# Altium PCB ETL_RB_v1.3.PcbDoc (part 1 of 5)
Units mm, origin at the board's own origin, x right, y up, seen from the top; angles counter-clockwise.
Board outline 130.3 x 56.5 mm, 8 copper layers (Top Layer, plane 1, M1, plane 2, plane 3, M2, plane 4, Bottom Layer), stack 0.972 mm thick; 212 components, 186 nets, 1928 pads, 1009 vias.
Unrouted connection lines stored in the file: 379.
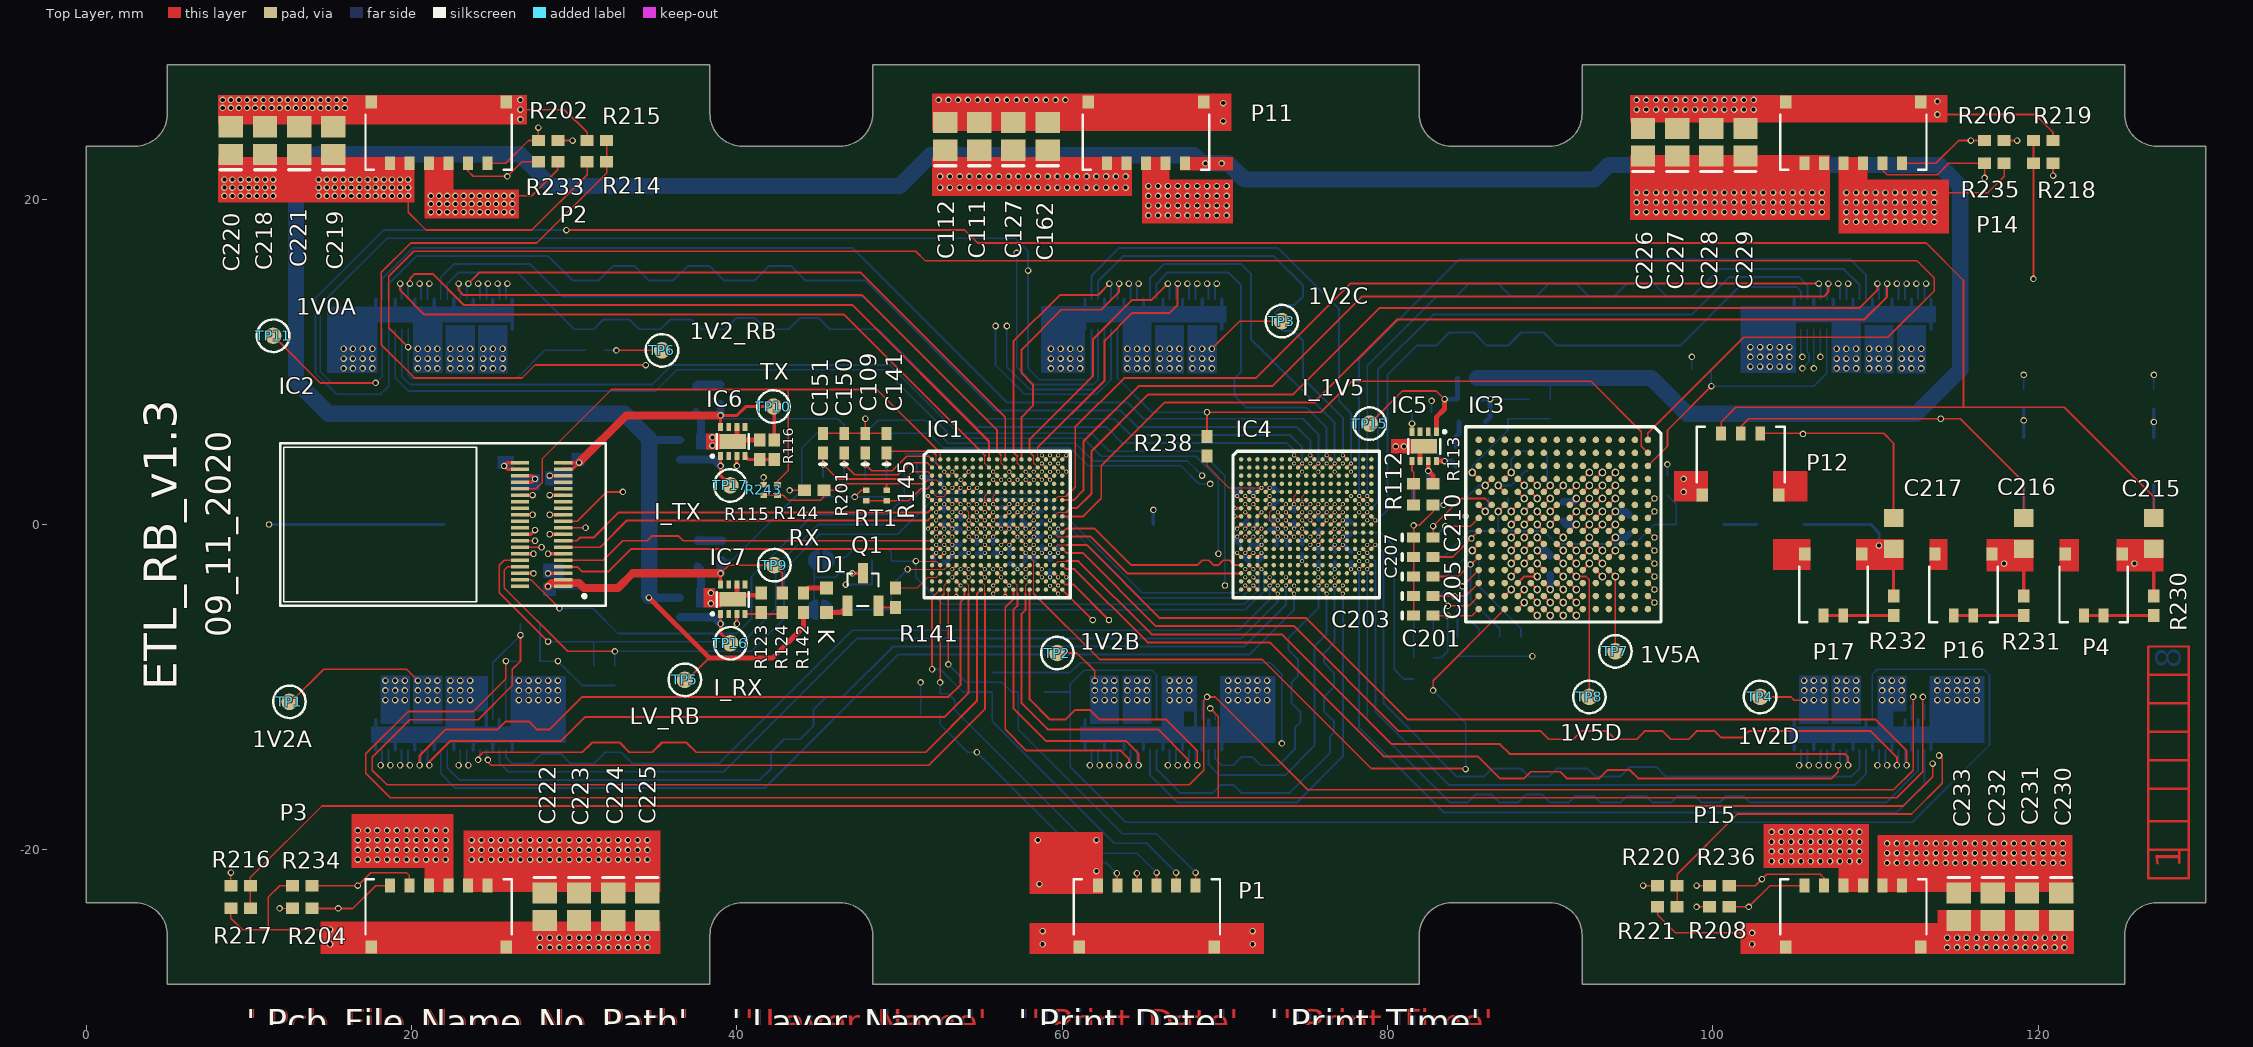
[diagram p0: Top Layer view]
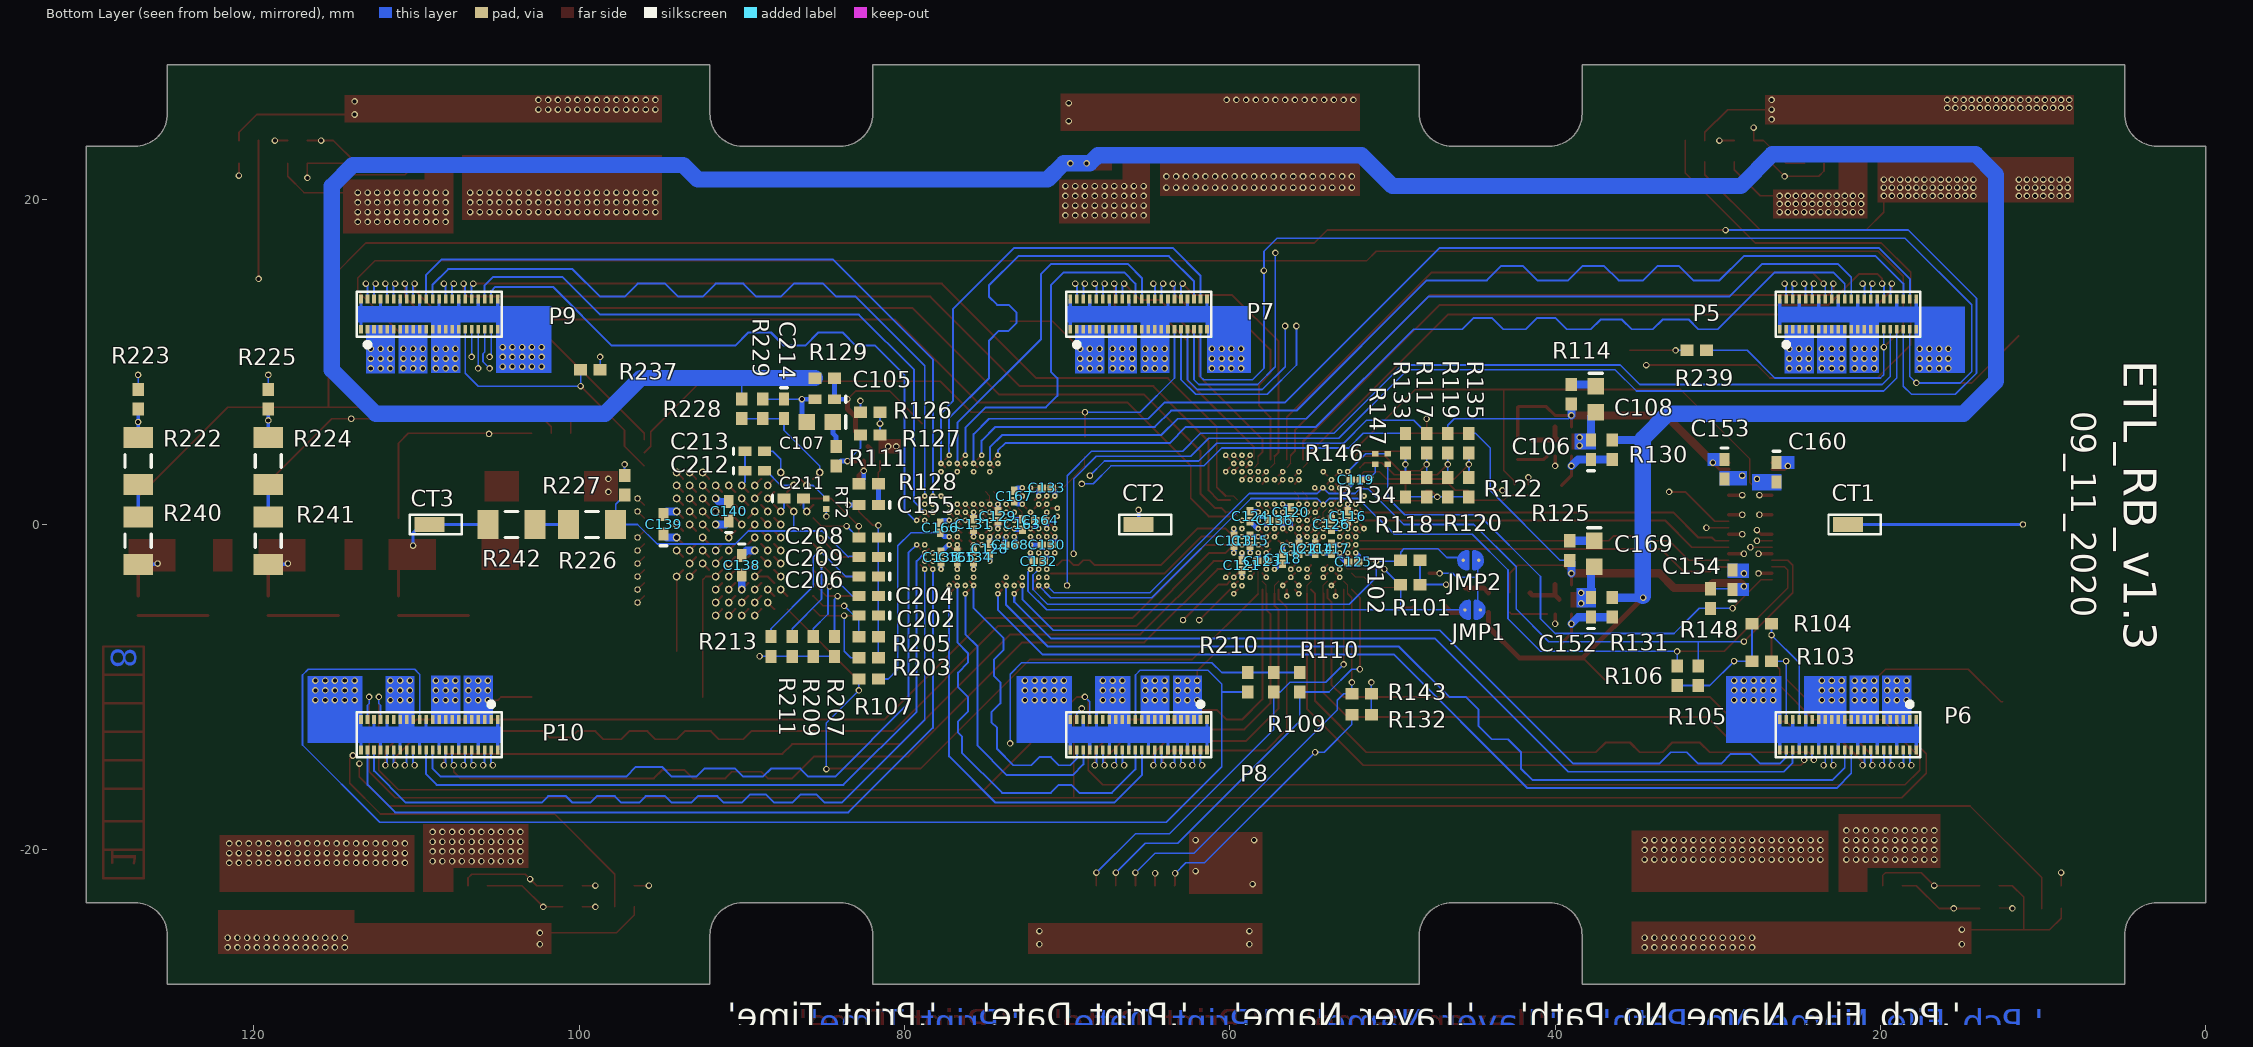
[diagram p1: Bottom Layer view, seen from below]
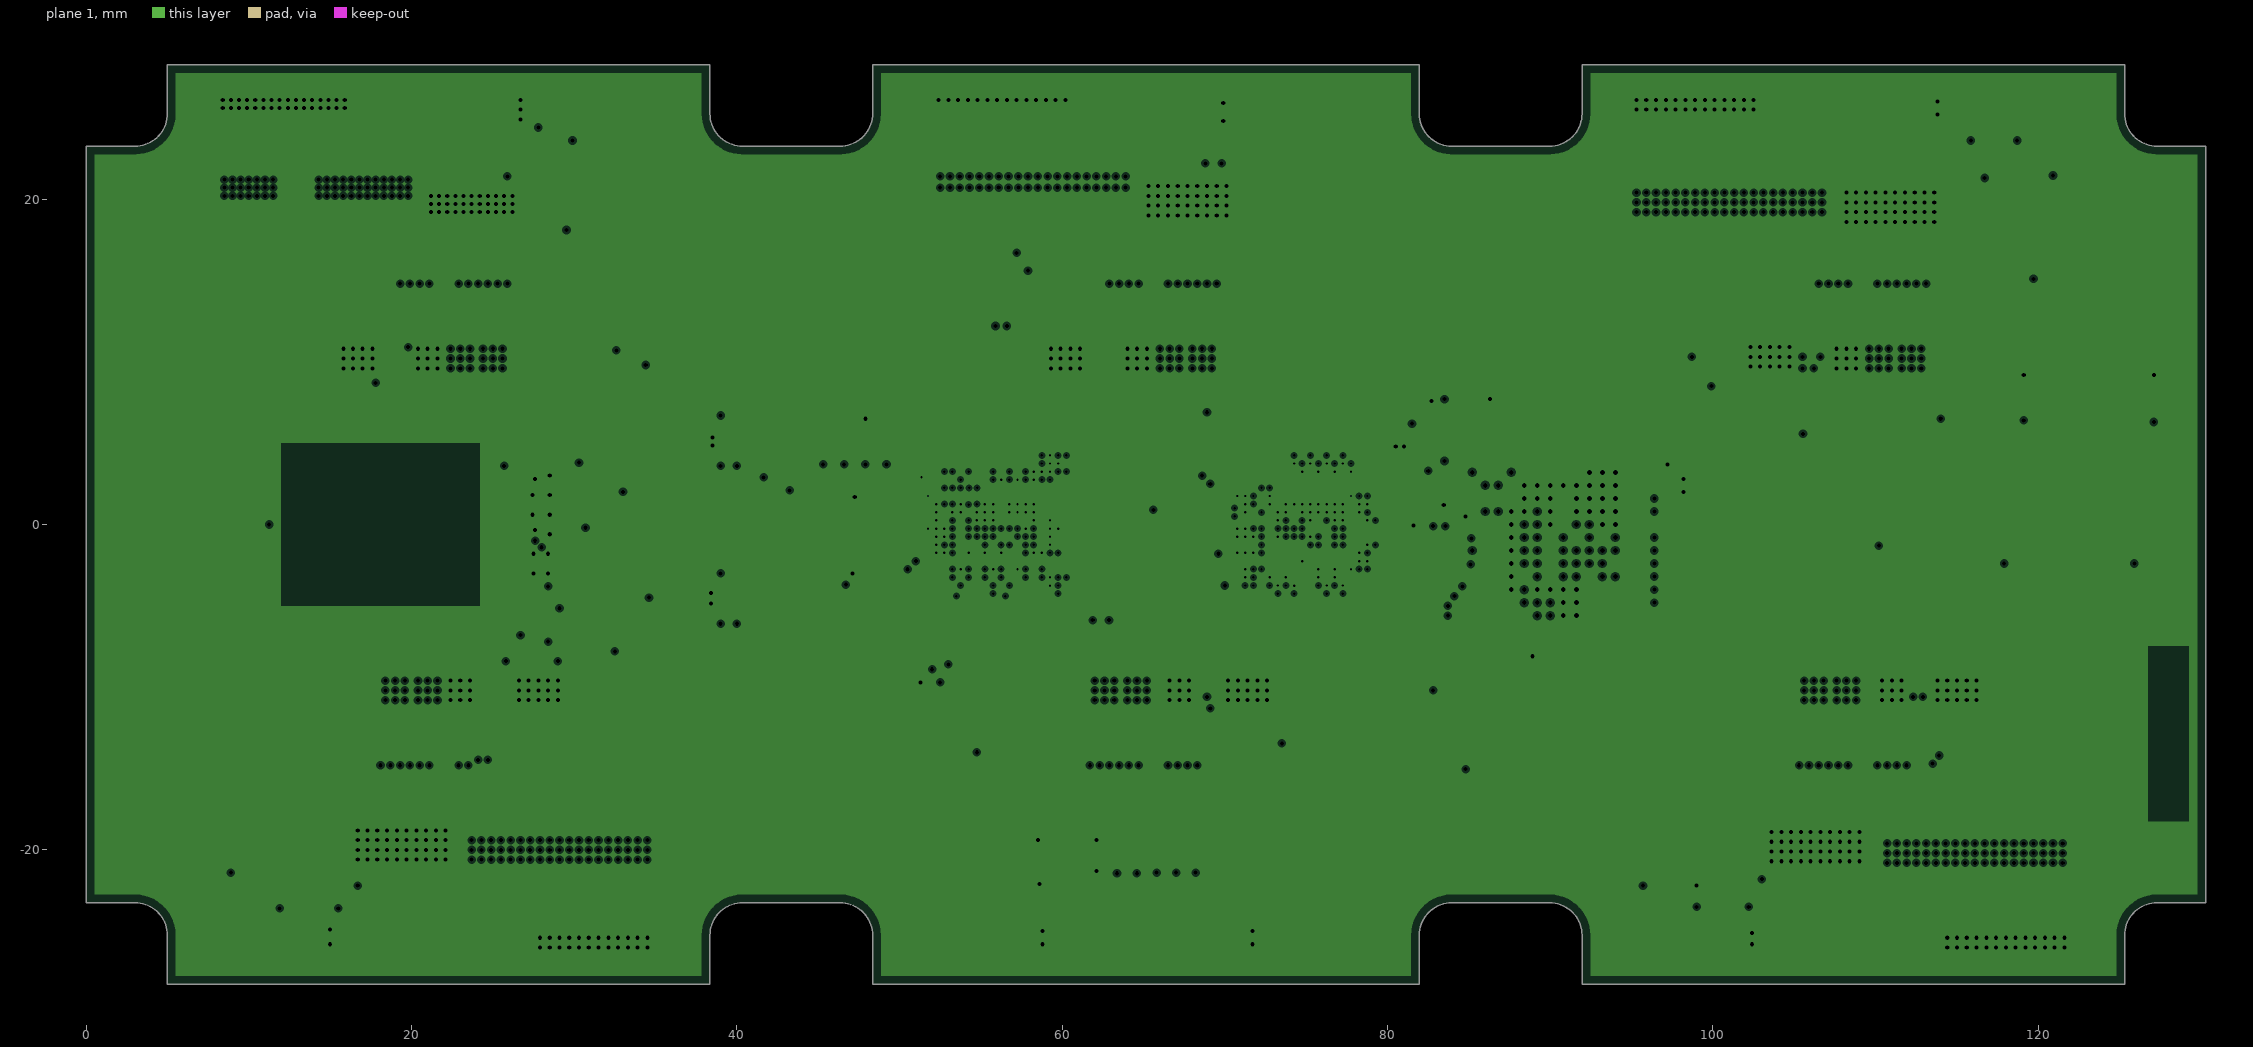
[diagram p2: plane 1, clearances drawn from the general rule]
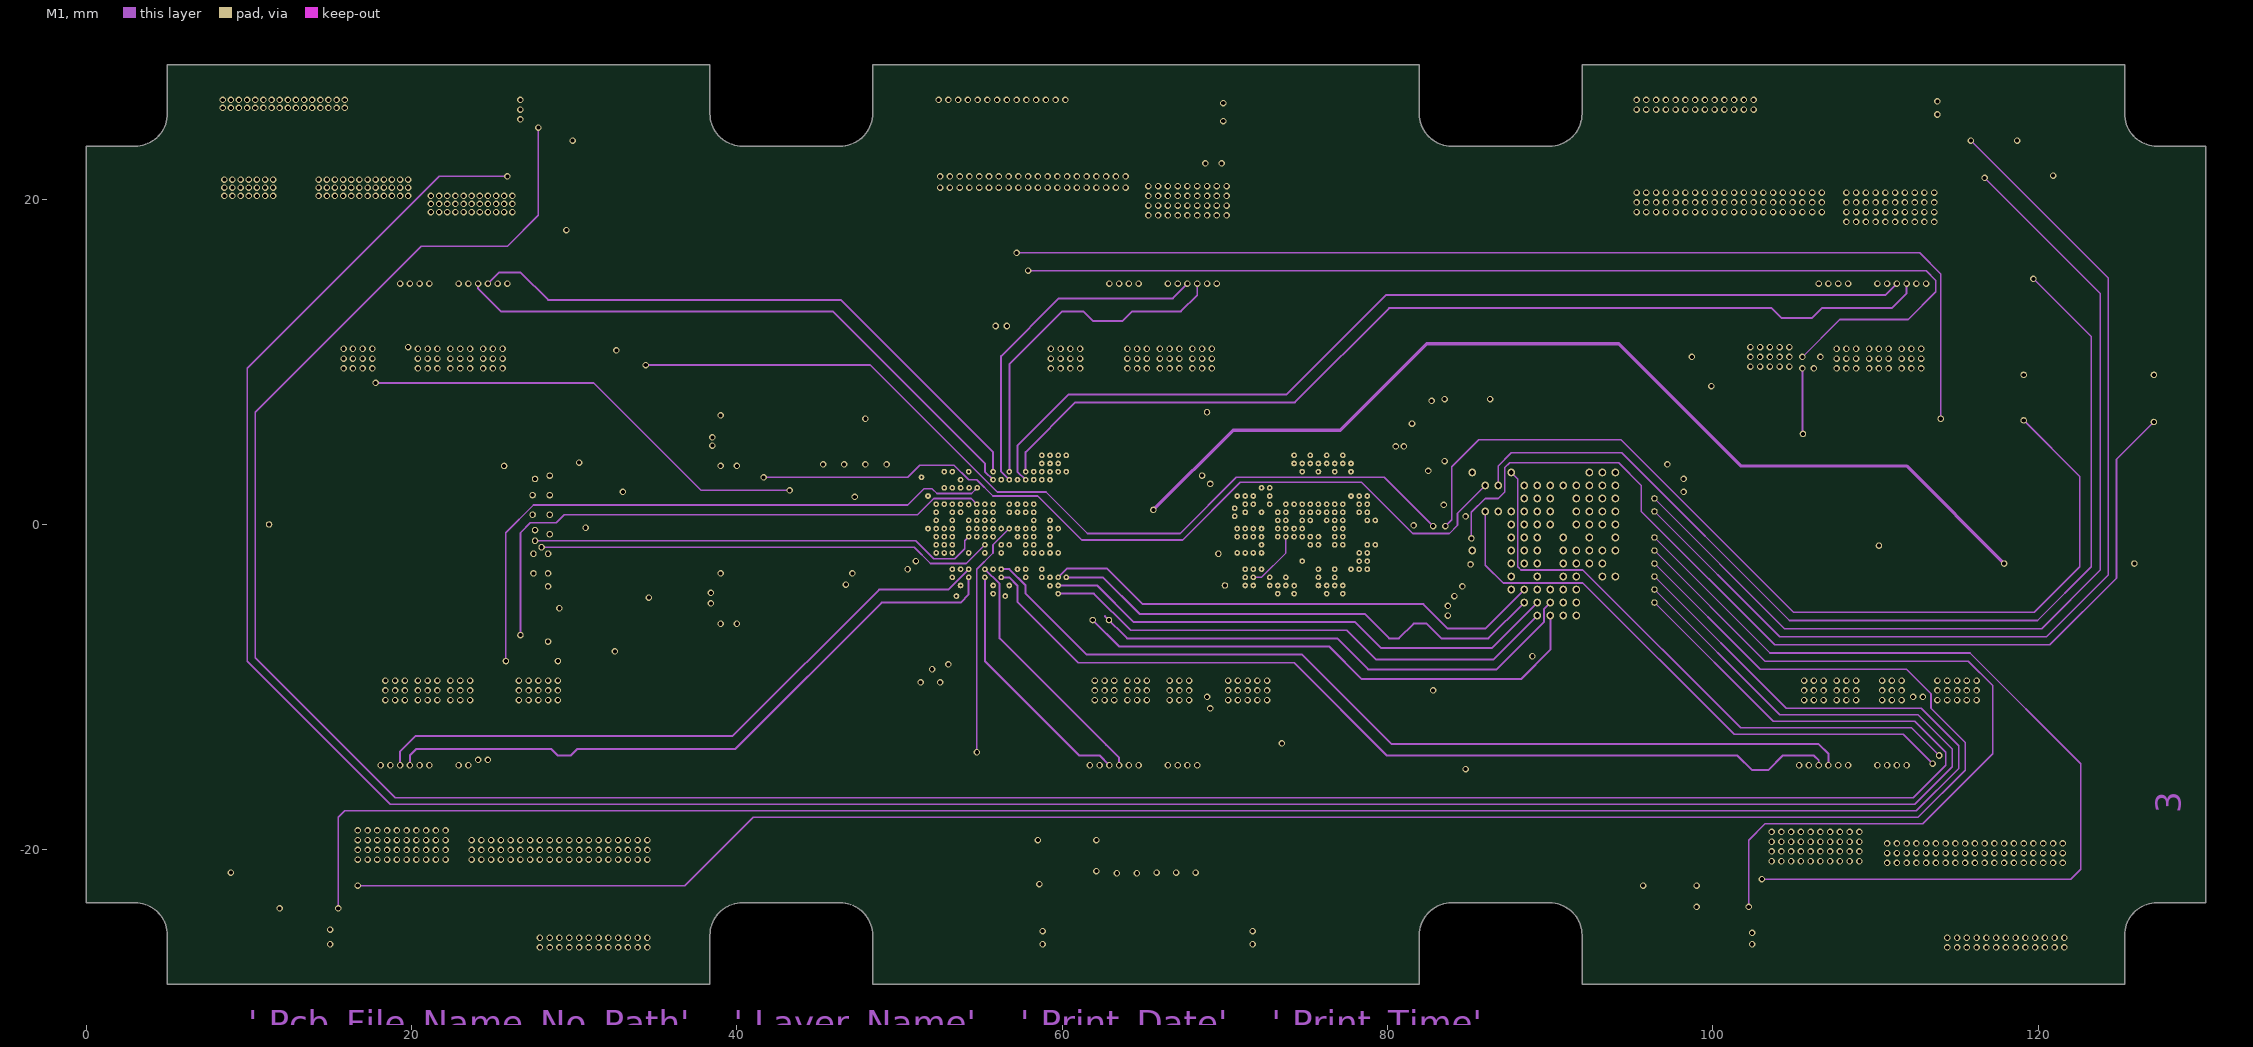
[diagram p3: M1]
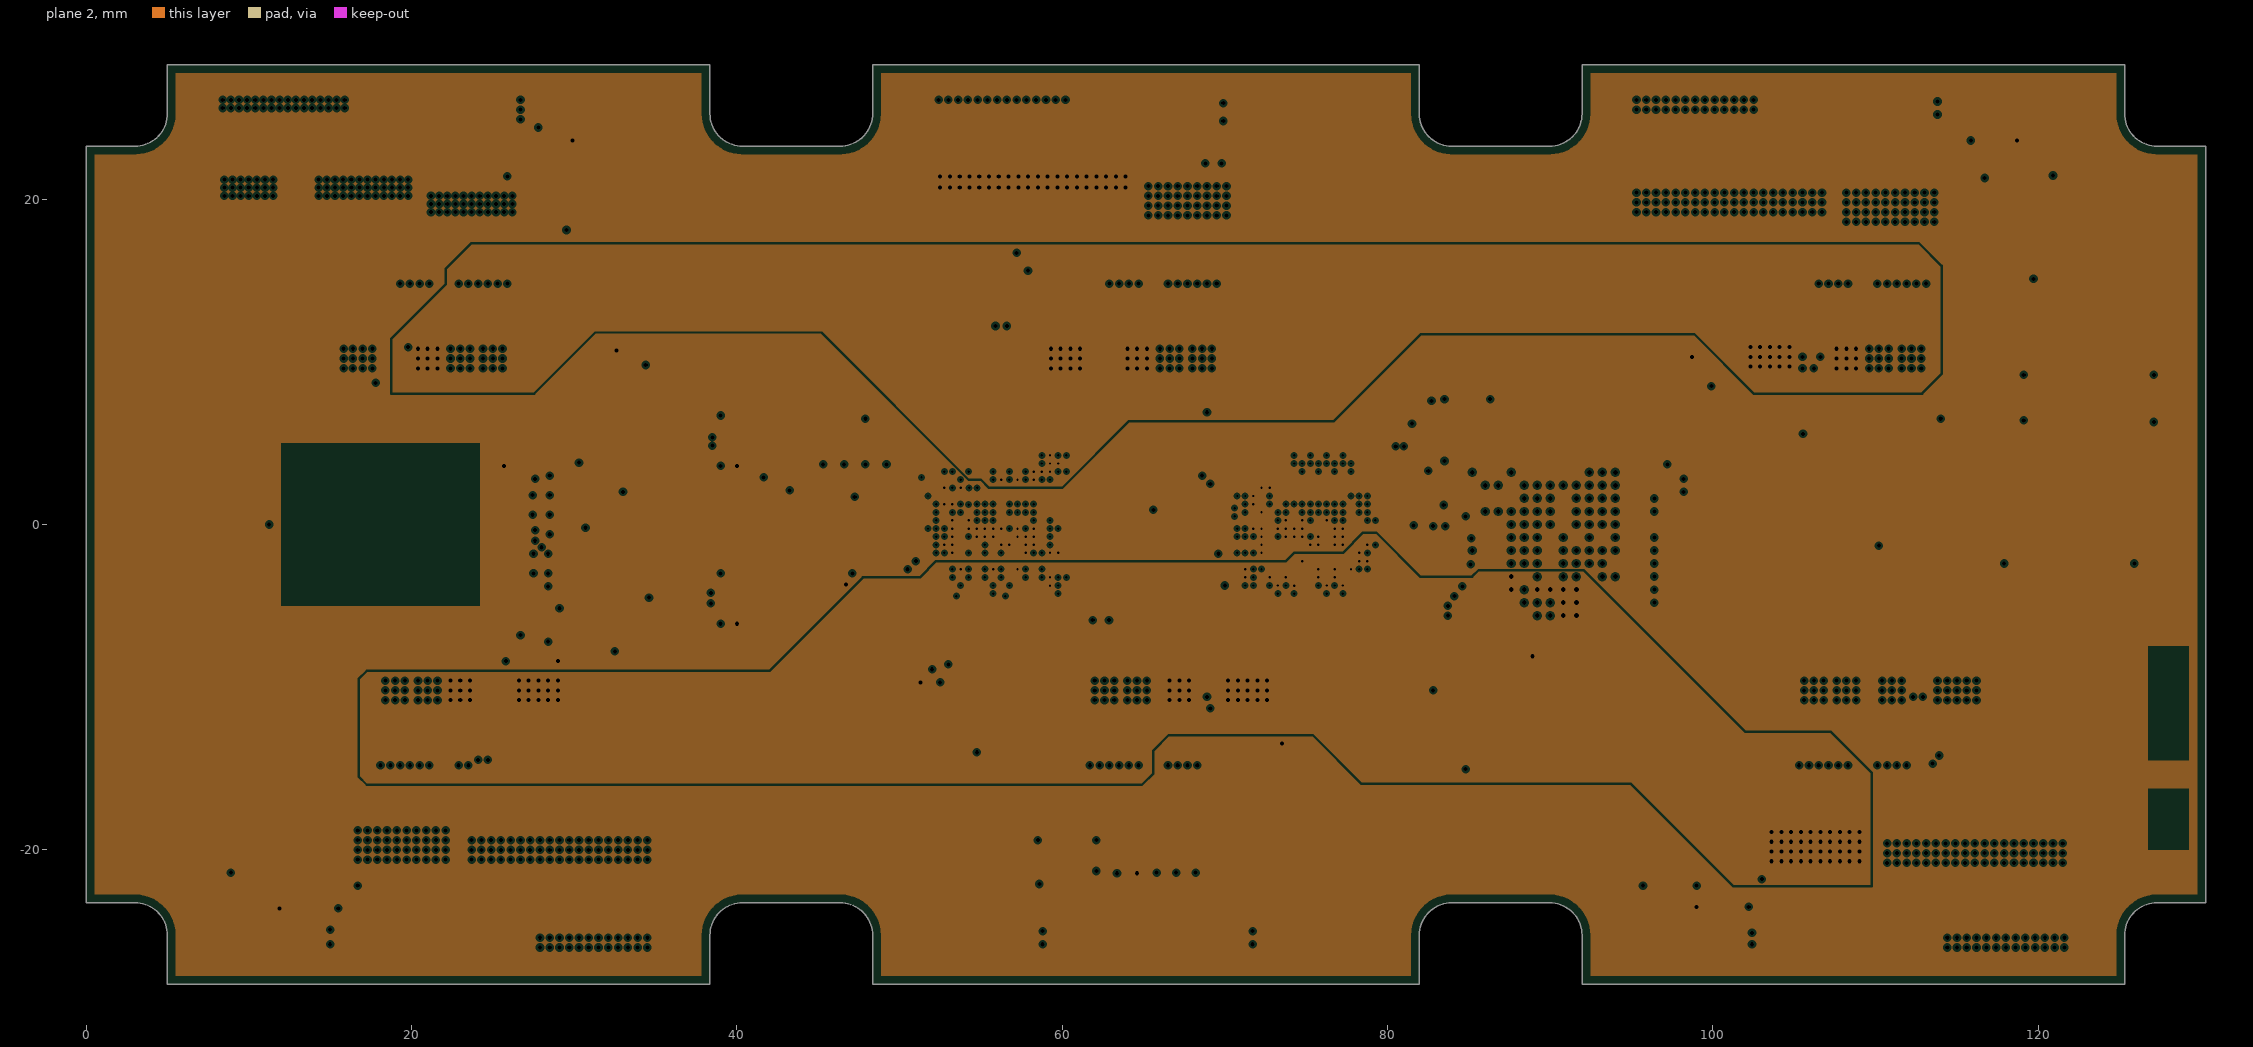
[diagram p4: plane 2, clearances drawn from the general rule]
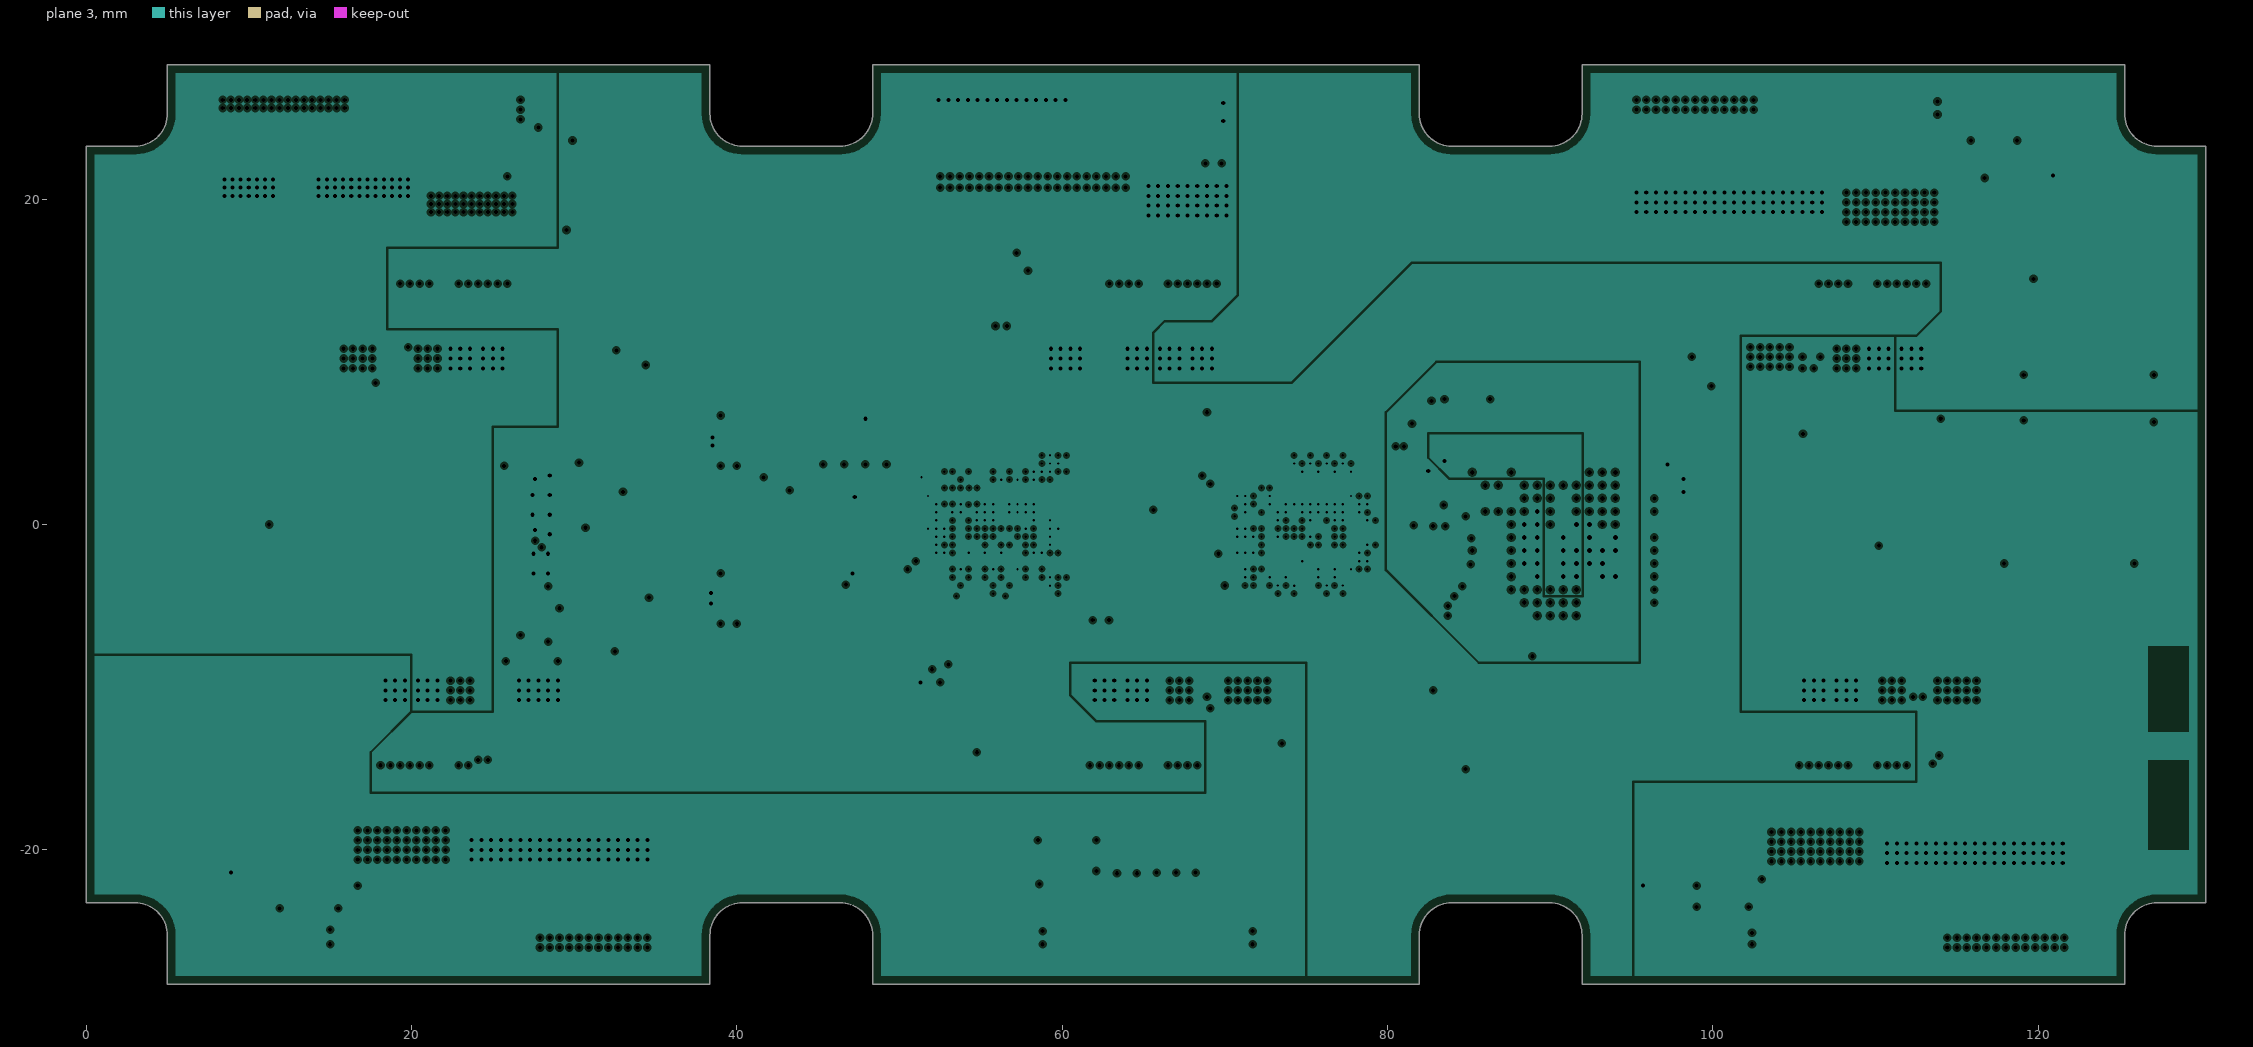
[diagram p5: plane 3, clearances drawn from the general rule]
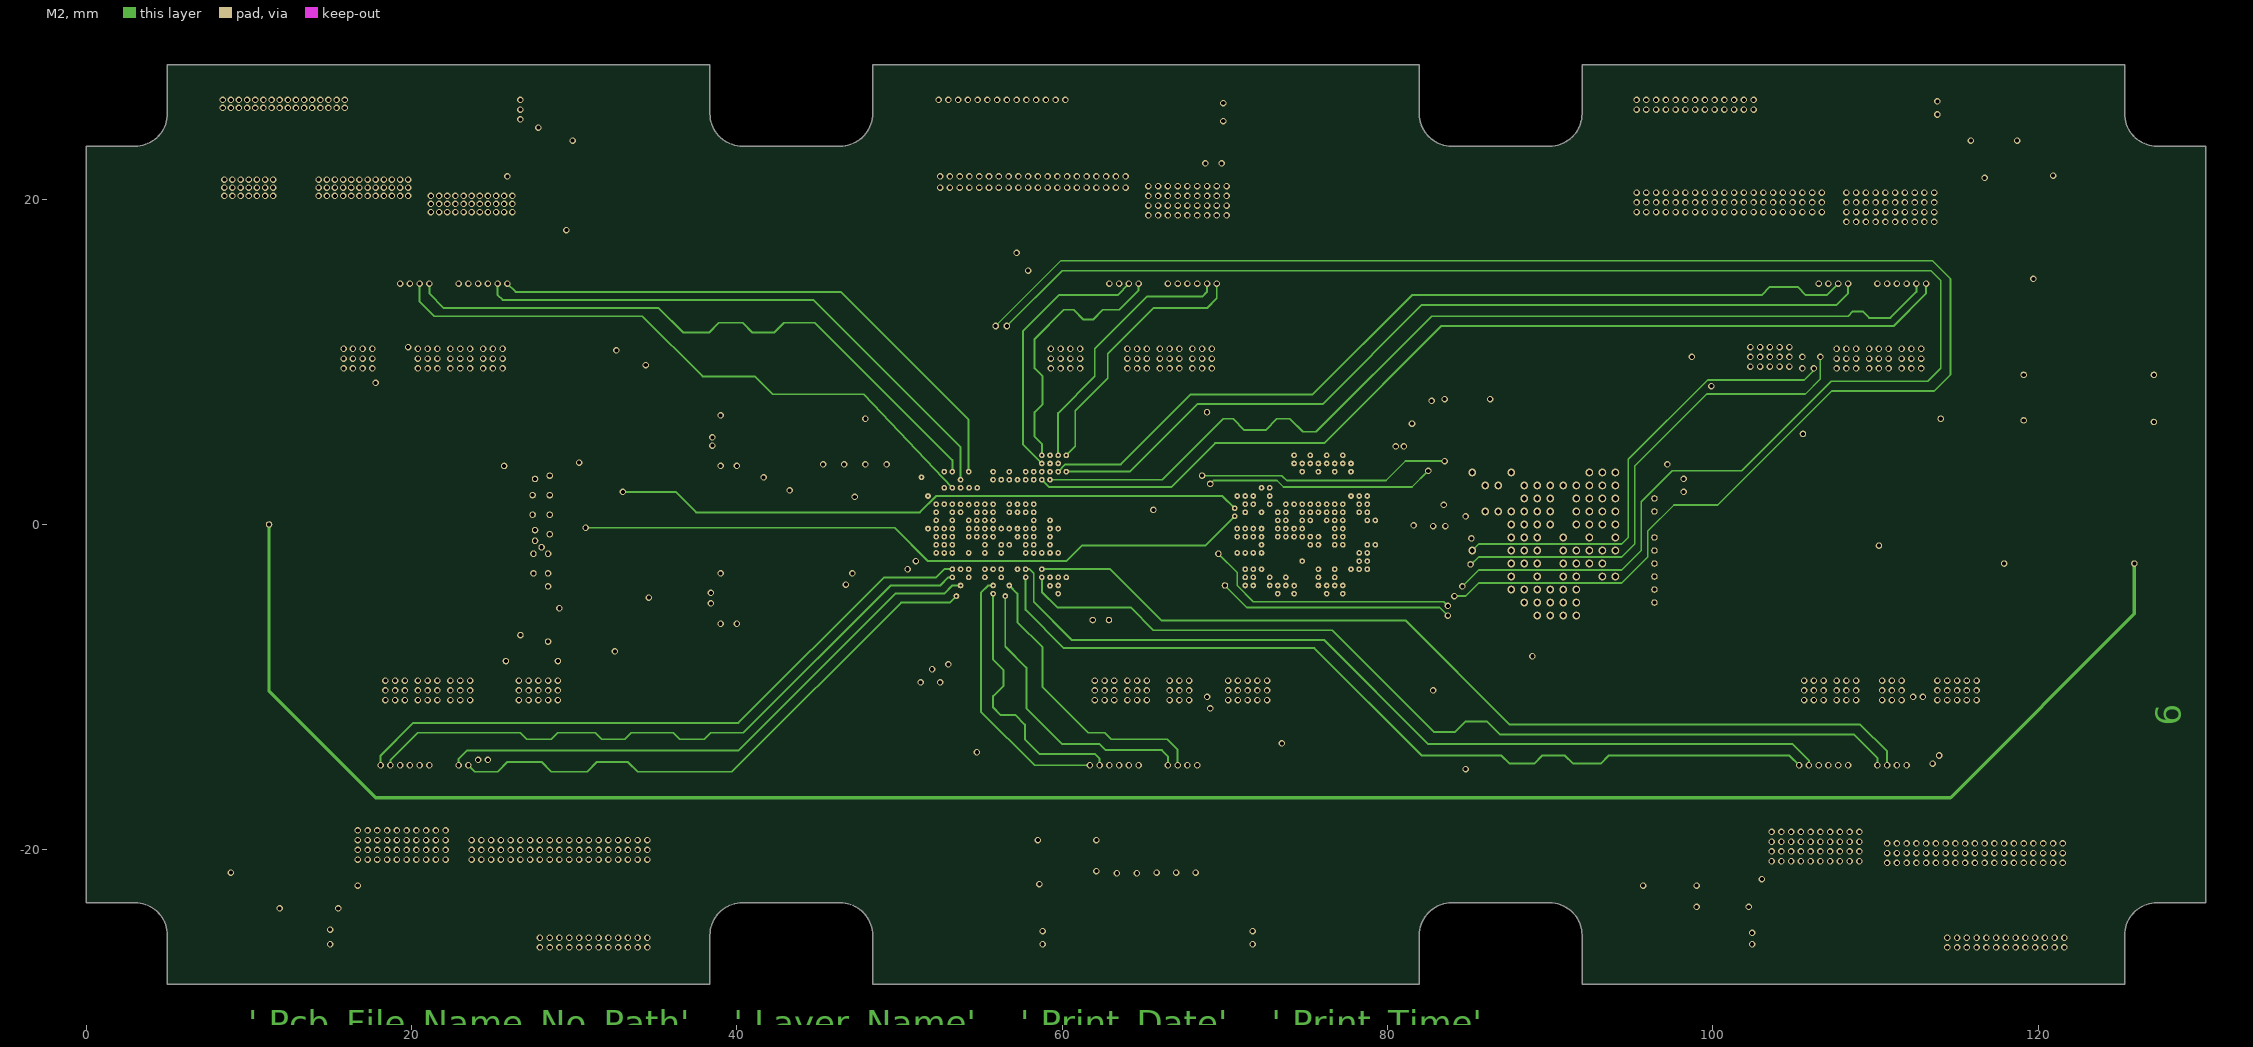
[diagram p6: M2]
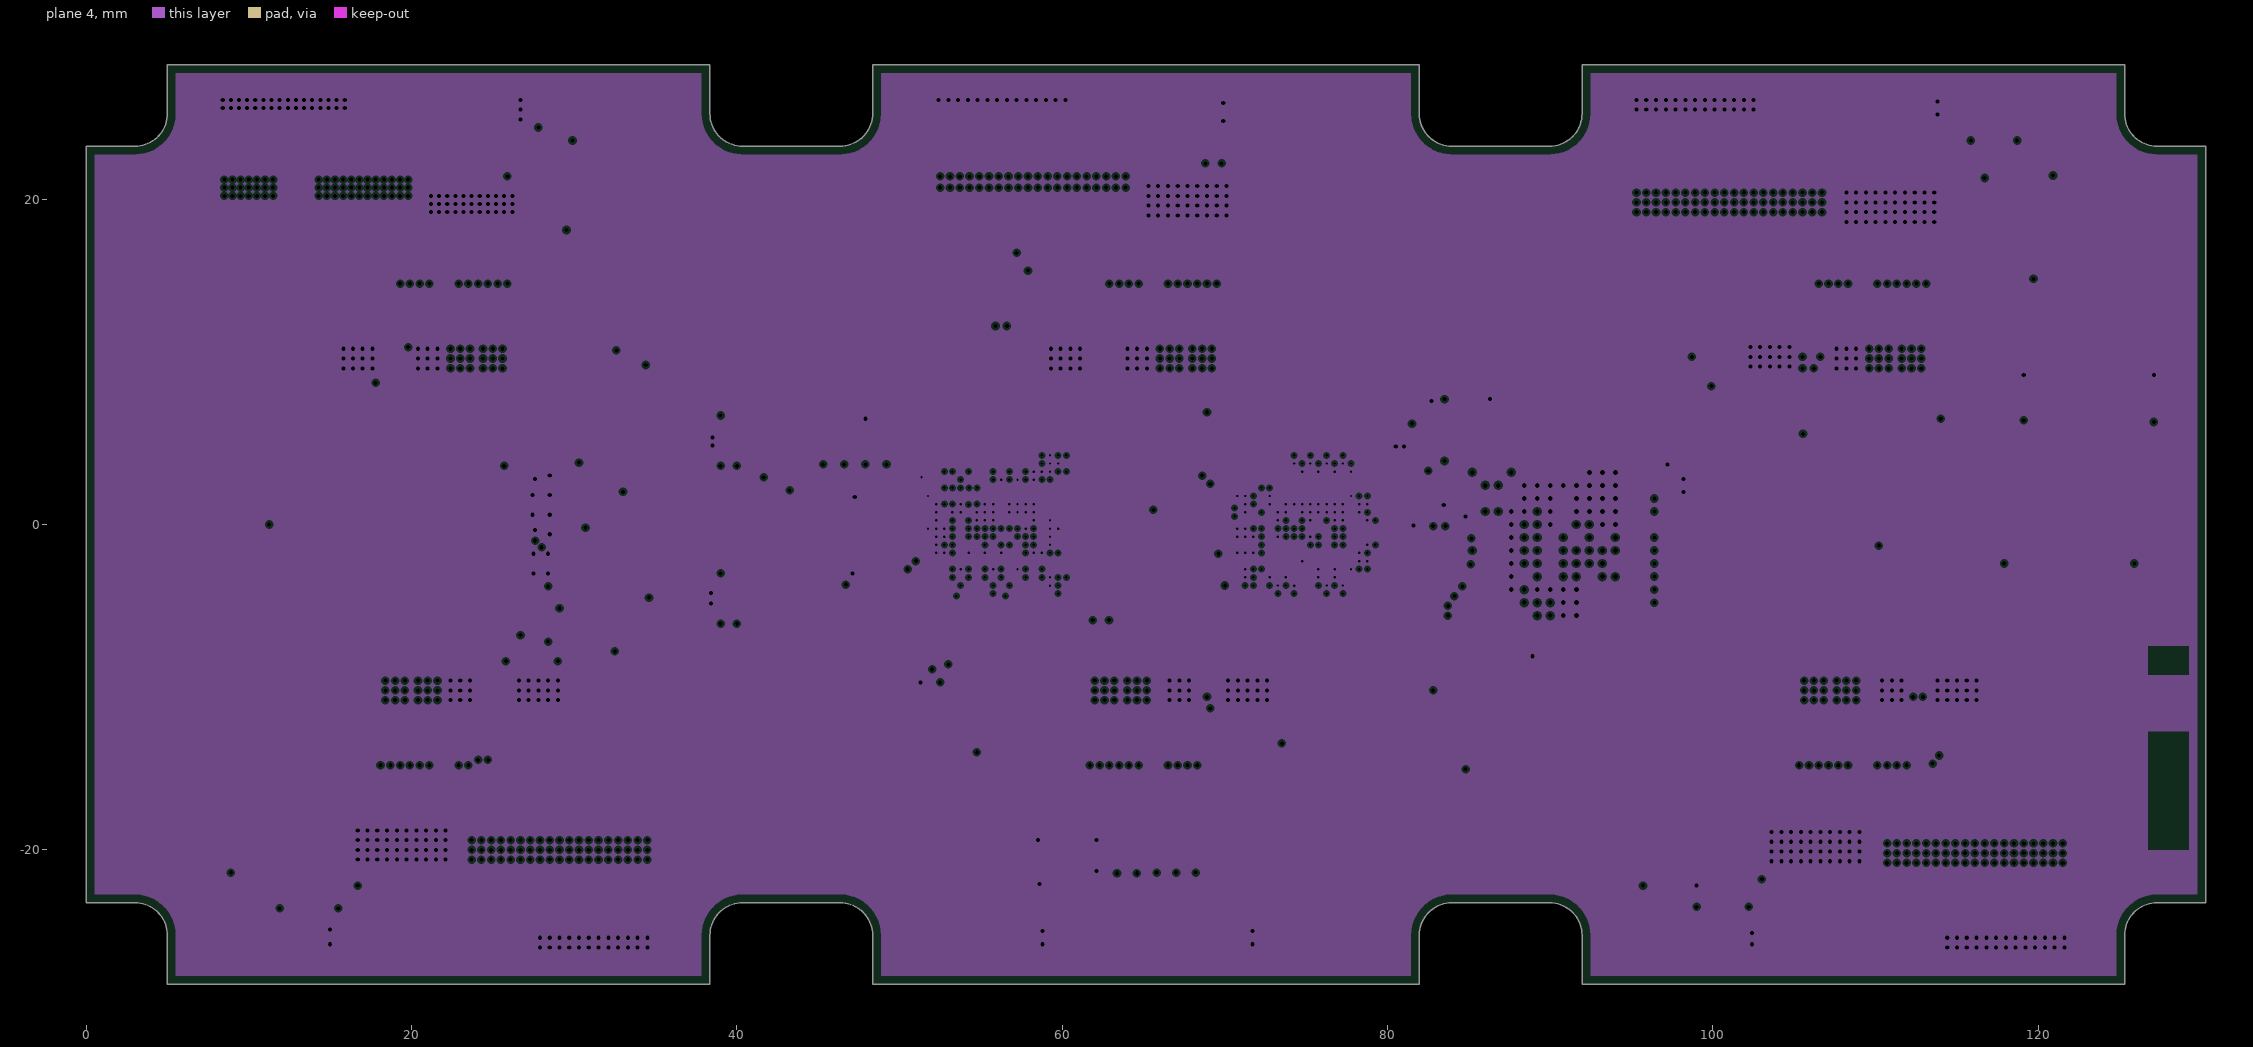
[diagram p7: plane 4, clearances drawn from the general rule]

## Layer stack, top to bottom
Top Solder: solder mask 0.0178, Solder Resist, Dk 4.1
Top Layer: signal copper 0.035
Dielectric 1: prepreg 0.0691, 1080, Dk 3.4
plane 1: plane copper 0.035, net GND
Dielectric 2: core 0.1016, TU-863, Dk 3.7
M1: signal copper 0.018
Dielectric 3: prepreg 0.1417, 1080, Dk 3.4
plane 2: plane copper 0.035, net (Multiple Nets)
Dielectric 4: core 0.1016, TU-863, Dk 3.7
plane 3: plane copper 0.035, net (Multiple Nets)
Dielectric 5: prepreg 0.1417, 1080, Dk 3.4
M2: signal copper 0.018
Dielectric 6: core 0.1016, TU-863, Dk 3.7
plane 4: plane copper 0.035, net GND
Dielectric 7: prepreg 0.0691, 1080, Dk 3.4
Bottom Layer: signal copper 0.035
Bottom Solder: solder mask 0.0178, Solder Resist, Dk 4.1

## Board outline
5,-28.25 5,-25.25 ccw(c3,-25.25) 3,-23.25 0,-23.25 0,23.25 3,23.25 ccw(c3,25.25) 5,25.25 5,28.25 38.35,28.25 38.35,25.25 ccw(c40.35,25.25) 40.35,23.25 46.35,23.25 ccw(c46.35,25.25) 48.35,25.25 48.35,28.25 81.95,28.25 81.95,25.25 ccw(c83.95,25.25) 83.95,23.25 89.95,23.25 ccw(c89.95,25.25) 91.95,25.25 91.95,28.25 125.3,28.25 125.3,25.25 ccw(c127.3,25.25) 127.3,23.25 130.3,23.25 130.3,-23.25 127.3,-23.25 ccw(c127.3,-25.25) 125.3,-25.25 125.3,-28.25 91.95,-28.25 91.95,-25.25 ccw(c89.95,-25.25) 89.95,-23.25 83.95,-23.25 ccw(c83.95,-25.25) 81.95,-25.25 81.95,-28.25 48.35,-28.25 48.35,-25.25 ccw(c46.35,-25.25) 46.35,-23.25 40.35,-23.25 ccw(c40.35,-25.25) 38.35,-25.25 38.35,-28.25

## Design rules (kind name [scope] priority, off if disabled: settings)
Clearance [All] p1: gap=0.076 ignorepadtopadclearanceinfootprint=FALSE except(0: Arc-Hole Track-Hole SMDPad-Hole THPad-Hole Via-Hole Fill-Hole Poly-Hole Region-Hole Text-Hole)
Height [All] p1 off: minheight=0 maxheight=25.4 prefheight=12.7
HoleToHoleClearance HoleToHoleClearance_1 [InNet('GND') or InNet('LV_RB') or InNet('1V5A') or InNet('1V5D') or InNet('1V2A') or InNet('1V2B') or InNet('1V2C') or InNet('1V2D') vs InNet('GND') or InNet('LV_RB') or InNet('1V5A') or InNet('1V5D') or InNet('1V2A') or InNet('1V2B') or InNet('1V2C') or InNet('1V2D')] p1: gap=0.15 allowstackedmicrovias=TRUE
HoleToHoleClearance [All] p2: gap=0.254 allowstackedmicrovias=TRUE
MinimumSolderMaskSliver [All] p1: minsoldermaskwidth=0.025
PlaneClearance PlaneClearance_1 [InNetClass('BV')] p1: clearance=0.508
PlaneClearance [All] p2: clearance=0.14
PlaneConnect PlaneConnect_1 [All] p1: planeconnectstyle=Direct reliefexpansion=0.508 reliefentries=4 reliefconductorwidth=0.254 reliefairgap=0.254
PolygonConnect [All] p1: connectstyle=Relief reliefconductorwidth=0.254 reliefentries=4 polygonreliefangle="90 Angle" airgapwidth=0.254
RoomDefinition WP7B [InComponentClass('WP7B')] p1 off: confinementstyle=ConfineIn formatcopy=TRUE lockcomponents=FALSE outline 192.75,16.8 613.75,16.8 613.75,46.8 192.75,46.8
RoomDefinition lpGBT [InComponentClass('lpGBT')] p2 off: confinementstyle=ConfineIn formatcopy=TRUE lockcomponents=FALSE outline 192,-36.75 1047,-36.75 1047,-1.75 192,-1.75
RoutingVias [All] p1: holewidth=0.25 width=0.4 viastyle="Through Hole" minholewidth=0.15 minwidth=0.25 maxholewidth=0.711 maxwidth=1.27
SilkToSilkClearance [All] p1: silktosilkclearance=0.025
SilkToSolderMaskClearance [IsPad] p1: minsilkscreentomaskgap=0.025 clearancetoexposedcopper=TRUE
SolderMaskExpansion [All] p1: expansion=0.051 istentingtop=FALSE
Width Width_HS [InNetClass('HS')] p1: maxlimit=0.13 minlimit=0.076 preferedwidth=0.12 midlayer1_minwidth=0.12 midlayer1_maxwidth=0.12 midlayer2_minwidth=0.12 midlayer2_maxwidth=0.12 bottomlayer_minwidth=0.12 bottomlayer_maxwidth=0.12 minimp=50.000000 maximp=50.000000 favimp=50.000000 // impedance controlled signals
Width [All] p2: maxlimit=2.54 minlimit=0.076 preferedwidth=0.12 toplayer_minwidth=0.076 midlayer1_minwidth=0.076 minimp=50.000000 maximp=50.000000 favimp=50.000000
23 further rules are at their usual default settings.

## Classes and differential pairs
component class WP7B: C201 C202 C203 C204 C205 C206 C207 C208 C209 C210 C211 C212 C213 C214 C215 C216 C217 C218 C219 C220 C221 C222 C223 C224 C225 C226 C227 C228 C229 C230 C231 C232 C233 CT1 CT2 CT3 P2 P3 P4 P5 P6 P7 P8 P9 P10 P12 P14 P15 P16 P17 R201 R202 R203 R204 R205 R206 R207 R208 R209 R210 R211 R213 R214 R215 R216 R217 R218 R219 R220 R221 R222 R223 R224 R225 R226 R227 R228 R229 R230 R231 R232 R233 R234 R235 R236 R237 R238 R239 R240 R241 R242 R243 RT2 TP1 TP2 TP3 TP4 TP5 TP6 TP7 TP8 TP9 TP10 TP11
component class lpGBT: C105 C106 C107 C108 C109 C111 C112 C113 C114 C115 C116 C117 C118 C119 C120 C121 C122 C123 C124 C125 C126 C127 C128 C129 C130 C131 C132 C133 C134 C135 C136 C138 C139 C140 C141 C150 C151 C152 C153 C154 C155 C160 C162 C163 C164 C165 C166 C167 C168 C169 D1 IC1 IC2 IC3 IC4 IC5 IC6 IC7 JMP1 JMP2 P1 P11 Q1 R101 R102 R103 R104 R105 R106 R107 R109 R110 R111 R112 R113 R114 R115 R116 R117 R118 R119 R120 R122 R123 R124 R125 R126 R127 R128 R129 R130 R131 R132 R133 R134 R135 R141 R142 R143 R144 R145 R146 R147 R148 RT1 TP15 TP16 TP17

## Components (designator, comment, footprint, x,y, rotation, side; value= is the part's Value field where it differs from the comment)
C105 "GRM155R71E104ME14D" capc1005n 84.9,7.7 r0 bottom value=0.1uF
C106 "GRM155R71E104ME14D" capc1005n 37.8,4.6 r90 bottom value=0.1uF
C107 "GRM185R60J106ME15J" CAPC1608N 85.2,6.3 r0 bottom value=10uF
C108 "GRM185R60J106ME15J" CAPC1608N 37.5,7.7 r270 bottom value=10uF
C109 "GRM155R71E104ME14D" capc1005n 47.9,5 r90 top value=0.1uF
C111 "GRM188R60J476ME15D" capc2012n 54.9,23.85 r90 top value=47uF
C112 "GRM188R60J476ME15D" capc2012n 52.8,23.85 r90 top value=47uF
C113 "GRM033R61C6104KE84D" CAPC0603N 59.75,-1 r90 bottom value=0.1uF
C114 "GRM033R61C6104KE84D" CAPC0603N 54.75,-1.5 r270 bottom value=0.1uF
C115 "GRM033R61C6104KE84D" CAPC0603N 58.75,-1 r270 bottom value=0.1uF
C116 "GRM033R61C6104KE84D" CAPC0603N 52.75,0.5 r270 bottom value=0.1uF
C117 "GRM033R61C6104KE84D" CAPC0603N 53.75,-1.5 r270 bottom value=0.1uF
C118 "GRM033R61C6104KE84D" CAPC0603N 56.75,-2.1 r270 bottom value=0.1uF
C119 "GRM033R61C6104KE84D" CAPC0603N 52.25,2.75 r180 bottom value=0.1uF
C120 "GRM033R61C6104KE84D" CAPC0603N 56.25,0.75 r90 bottom value=0.1uF
C121 "GRM033R61C6104KE84D" CAPC0603N 59.25,-2.5 r270 bottom value=0.1uF
C122 "GRM033R61C153KE84D" CAPC0603N 55.75,-1.5 r270 bottom value=15nF
C123 "GRM033R61C153KE84D" CAPC0603N 58,-2.25 r0 bottom value=15nF
C124 "GRM033R61C153KE84D" CAPC0603N 58.75,0.5 r90 bottom value=15nF
C125 "GRM033R61C153KE84D" CAPC0603N 52.4,-2.3 r180 bottom value=15nF
C126 "GRM033R61C153KE84D" CAPC0603N 53.75,0 r90 bottom value=15nF
C127 "GRM188R60J476ME15D" capc2012n 57,23.85 r90 top value=47uF
C128 "GRM033R61C6104KE84D" CAPC0603N 74.75,-1.5 r270 bottom value=0.1uF
C129 "GRM033R61C6104KE84D" CAPC0603N 74.25,0.5 r90 bottom value=0.1uF
C130 "GRM033R61C6104KE84D" CAPC0603N 71.25,-1.25 r180 bottom value=0.1uF
C131 "GRM033R61C6104KE84D" CAPC0603N 75.75,0 r90 bottom value=0.1uF
C132 "GRM033R61C6104KE84D" CAPC0603N 71.75,-2.25 r180 bottom value=0.1uF
C133 "GRM033R61C6104KE84D" CAPC0603N 71.25,2.25 r180 bottom value=0.1uF
C134 "GRM033R61C6104KE84D" CAPC0603N 75.75,-2 r270 bottom value=0.1uF
C135 "GRM033R61C6104KE84D" CAPC0603N 77.75,-2 r270 bottom value=0.1uF
C136 "GRM033R61C6104KE84D" CAPC0603N 57.25,0.25 r0 bottom value=0.1uF
C138 "GRM155R71E104ME14D" capc1005n 90,-2.5 r270 bottom value=0.1uF
C139 "GRM155R71E104ME14D" capc1005n 94.8,0 r90 bottom value=0.1uF
C140 "GRM155R71E104ME14D" capc1005n 90.8,0.8 r90 bottom value=0.1uF
C141 "GRM155R71E104ME14D" capc1005n 49.2,5 r90 top value=0.1uF
C150 "GRM155R71E104ME14D" capc1005n 46.6,5 r90 top value=0.1uF
C151 "GRM155R71E104ME14D" capc1005n 45.3,5 r90 top value=0.1uF
C152 "GRM155R71E104ME14D" capc1005n 37.8,-5.1 r90 bottom value=0.1uF
C153 "GRM155R71E104ME14D" capc1005n 29.6,3.4 r270 bottom value=0.1uF
C154 "GRM155R71E104ME14D" capc1005n 29.1,-3.4 r90 bottom value=0.1uF
C155 "GRM153R60J475ME15D" capc1005n 82.2,1.2 r0 bottom value=4.7uF
C160 "GRM155R71E104ME14D" CAPC1005N 26.4,3.2 r270 bottom value=0.1uF
C162 "GRM188R60J476ME15D" capc2012n 59.1,23.85 r90 top value=47uF
C163 "GRM033R61C6104KE84D" CAPC0603N 72.75,0 r90 bottom value=0.1uF
C164 "GRM033R61C153KE84D" CAPC0603N 71.65,0.25 r180 bottom value=15nF
C165 "GRM033R61C153KE84D" CAPC0603N 76.75,-2 r270 bottom value=15nF
C166 "GRM033R61C153KE84D" CAPC0603N 77.8,-0.2 r90 bottom value=15nF
C167 "GRM033R61C153KE84D" CAPC0603N 73.25,1.75 r270 bottom value=15nF
C168 "GRM033R61C153KE84D" CAPC0603N 73.5,-1.25 r180 bottom value=15nF
C169 "GRM185R60J106ME15J" CAPC1608N 37.6,-1.8 r270 bottom value=10uF
C201 "GRM155R71E104ME14D" capc1005n 82.2,-5.6 r0 top value=0.1uF
C202 "GRM155R71E104ME14D" capc1005n 82.2,-5.6 r0 bottom value=0.1uF
C203 "GRM155R71E104ME14D" capc1005n 82.2,-4.4 r0 top value=0.1uF
C204 "GRM155R71E104ME14D" capc1005n 82.2,-4.4 r0 bottom value=0.1uF
C205 "GRM155R71E104ME14D" capc1005n 82.2,-3.2 r0 top value=0.1uF
C206 "GRM155R71E104ME14D" capc1005n 82.2,-3.2 r0 bottom value=0.1uF
C207 "GRM155R71E104ME14D" capc1005n 82.2,-2 r0 top value=0.1uF
C208 "GRM155R71E104ME14D" capc1005n 82.2,-0.8 r0 bottom value=0.1uF
C209 "GRM155R71E104ME14D" capc1005n 82.2,-2 r0 bottom value=0.1uF
C210 "GRM155R71E104ME14D" capc1005n 82.2,-0.8 r0 top value=0.1uF
C211 "GRM155R71E104ME14D" capc1005n 86.8,1.6 r180 bottom value=0.1uF
C212 "GRM155R71E104ME14D" capc1005n 89.2,3.3 r180 bottom value=0.1uF
C213 "GRM155R71E104ME14D" capc1005n 89.2,4.5 r180 bottom value=0.1uF
C214 "GRM155R71E104ME14D" capc1005n 87.4,7.1 r270 bottom value=0.1uF
C215 "C0805X7R102-152MNE" VENKEL0805 127.1,-1.5 r90 top value=1500pF
C216 "C0805X7R102-152MNE" VENKEL0805 119.1,-1.5 r90 top value=1500pF
C217 "C0805X7R102-152MNE" VENKEL0805 111.1,-1.5 r90 top value=1500pF
C218 "GRM188R60J476ME15D" capc2012n 11,23.6 r90 top value=47uF
C219 "GRM188R60J476ME15D" capc2012n 15.2,23.6 r90 top value=47uF
C220 "GRM188R60J476ME15D" capc2012n 8.9,23.6 r90 top value=47uF
C221 "GRM188R60J476ME15D" capc2012n 13.1,23.6 r90 top value=47uF
C222 "GRM188R60J476ME15D" capc2012n 28.2,-23.5 r270 top value=47uF
C223 "GRM188R60J476ME15D" capc2012n 30.3,-23.5 r270 top value=47uF (schematic designator Cc223)
C224 "GRM188R60J476ME15D" capc2012n 32.4,-23.5 r270 top value=47uF
C225 "GRM188R60J476ME15D" capc2012n 34.5,-23.5 r270 top value=47uF
C226 "GRM188R60J476ME15D" capc2012n 95.7,23.5 r90 top value=47uF
C227 "GRM188R60J476ME15D" capc2012n 97.8,23.5 r90 top value=47uF
C228 "GRM188R60J476ME15D" capc2012n 99.9,23.5 r90 top value=47uF
C229 "GRM188R60J476ME15D" capc2012n 102,23.5 r90 top value=47uF
C230 "GRM188R60J476ME15D" capc2012n 121.4,-23.5 r270 top value=47uF
C231 "GRM188R60J476ME15D" capc2012n 119.3,-23.5 r270 top value=47uF
C232 "GRM188R60J476ME15D" capc2012n 117.2,-23.5 r270 top value=47uF
C233 "GRM188R60J476ME15D" capc2012n 115.1,-23.5 r270 top value=47uF
CT1 "TE1551631-5" CONTACT 22,0 r0 bottom locked
CT2 "TE1551631-5" CONTACT 65.6,0 r0 bottom locked
CT3 "TE1551631-5" CONTACT 109.2,0 r0 bottom locked
D1 "LTST-C191KGKT" LED_RED 45.5,-3.9 r270 top
IC1 "LPGBT" BGA289X17 52,4 r0 top
IC2 "DF40C-40DS-0.4V" VTRX+ 29.33,-3.8 r90 top locked
IC3 "GBT-SCA" BGA196C80P14X14_1200X1200X170 96,5.2 r270 top
IC4 "LPGBT" BGA289X17 71,4 r0 top
IC5 "linPOL12V" WDFNX208 83,5.7 r180 top
IC6 "linPOL12V" WDFNX208 39,4.2 r0 top
IC7 "linPOL12V" WDFNX208 39,-5.5 r0 top
JMP1 "Not a component, printed on PCB" JMP2PCB#1 45.1,-5.25 r90 bottom
JMP2 "Not a component, printed on PCB" JMP2PCB#2 45.2,-2.2 r90 bottom
P1 "DF57-6P-1.2V(21)" DF57-6 68.2,-22.2 r180 top locked
P2 "DF57-6P-1.2V(21)" DF57-6 18.675,22.2 r0 top locked
P3 "DF57-6P-1.2V(21)" DF57-6 24.675,-22.2 r180 top locked
P4 "DF57-2P-1.2V(21)" DF57-2 122.8,-5.6 r0 top
P5 "WP7B-P040VA1" WP7B-40P 25.8,12 r180 bottom locked
P6 "WP7B-P040VA1" WP7B-40P 18.2,-12 r0 bottom locked
P7 "WP7B-P040VA1" WP7B-40P 69.4,12 r180 bottom locked
P8 "WP7B-P040VA1" WP7B-40P 61.8,-12 r0 bottom locked
P9 "WP7B-P040VA1" WP7B-40P 113,12 r180 bottom locked
P10 "WP7B-P040VA1" WP7B-40P 105.4,-12 r0 bottom locked
P11 "DF57-5P-1.2V(21)" DF57-5 62.75,22.2 r0 top locked
P12 "DF57-3P-1.2V(21)" DF57-3 102.9,5.6 r180 top
P14 "DF57-6P-1.2V(21)" DF57-6 105.625,22.2 r0 top locked
P15 "DF57-6P-1.2V(21)" DF57-6 111.625,-22.2 r180 top locked
P16 "DF57-2P-1.2V(21)" DF57-2 114.8,-5.6 r0 top
P17 "DF57-2P-1.2V(21)" DF57-2 106.8,-5.6 r0 top
Q1 "KSC2223YMTF" SOT-23 46.8,-5 r0 top
R101 "ERJ-2GEJ392X" resc1005n 48.9,-3.7 r180 bottom
R102 "ERJ-2GEJ392X" resc1005n 48.9,-2.2 r0 bottom
R103 "ERJ-2GEJ202X" resc1005n 27.3,-8.4 r0 bottom
R104 "ERJ-2GEJ202X" resc1005n 27.3,-6.1 r0 bottom
R105 "ERJ-2GEJ392X" resc1005n 31.2,-9.3 r270 bottom
R106 "ERJ-2GEJ392X" resc1005n 32.5,-9.3 r270 bottom
R107 "ERJ-2GEJ392X" resc1005n 82.2,-9.5 r0 bottom
R109 "ERJ-2GEJ392X" resc1005n 57.3,-9.7 r90 bottom
R110 "ERJ-2GEJ392X" resc1005n 55.7,-9.7 r90 bottom
R111 "ERJ-2BQJR30X" resc1005n 84.2,4.2 r90 bottom
R112 "RR0510P-4020-D" resc1005n 82.2,1.2 r0 top
R113 "RR0510P-6040-D" resc1005n 82.2,2.5 r180 top
R114 "ERJ-2BQJR30X" resc1005n 39,8 r270 bottom
R115 "RR0510P-4870-D" resc1005n 41.4,4.6 r90 top
R116 "RR0510P-1541-D" resc1005n 42.3,4.6 r270 top
R117 "RR0510P-152-D" resc1005n 47.9,5 r90 bottom
R118 "RR0510P-202-D" resc1005n 47.9,2.3 r90 bottom
R119 "RR0510P-302-D" resc1005n 46.6,5 r90 bottom
R120 "RR0510P-152-D" resc1005n 46.6,2.3 r90 bottom
R122 "RR0510P-152-D" resc1005n 45.3,2.3 r90 bottom
R123 "RR0510P-4870-D" resc1005n 41.5,-4.8 r90 top
R124 "RR0510P-1541-D" resc1005n 42.8,-4.8 r270 top
R125 "ERJ-2BQJR30X" resc1005n 39.1,-1.6 r270 bottom
R126 "RR0510P-4020-D" resc1005n 82.1,6.9 r0 bottom
R127 "RR0510P-6040-D" resc1005n 82.1,5.5 r180 bottom
R128 "ERJ-2BQJR30X" resc1005n 82.2,2.5 r180 bottom
R129 "ERJ-2GEJ5R1X" resc1005n 84.9,9 r180 bottom
R130 "ERJ-2GEJ5R1X" resc1005n 36.5,4.6 r270 bottom
R131 "ERJ-2GEJ5R1X" resc1005n 36.5,-5.1 r270 bottom
R132 "ERJ-2GEJ392X" resc1005n 51.9,-11.7 r180 bottom
R133 "RR0510P-152-D" resc1005n 49.2,5 r90 bottom
R134 "RR0510P-202-D" resc1005n 49.2,2.3 r90 bottom
R135 "RR0510P-302-D" resc1005n 45.3,5 r90 bottom
R141 "ERJ-2GEJ511X" resc1005n 49.75,-4.5 r270 top
R142 "ERJ-2GEJ102X" resc1005n 44.1,-4.8 r90 top
R143 "ERJ-2GEJ392X" resc1005n 51.9,-10.4 r0 bottom
R144 "ERJ-1GNF-1002C" RESC0603 42.5,2.45 r270 top
R145 "ERJ-1GNF-1002C" resc0603 49.2,1.45 r90 top
R146 "ERJ-1GEF4023C" resc0603 51.05,3.7 r90 bottom
R147 "ERJ-1GNF1004C" resc0603 50.3,4.35 r270 bottom
R148 "ERJ-2RKF4751X" resc1005n 30.45,-4.55 r90 bottom
R201 "ERJ-2GEJ201X" resc1005n 44.75,2.1 r0 top
R202 "ERJ-2GEJ392X" resc1005n 28.4,23.6 r0 top
R203 "RR0510P-302-D" resc1005n 82.2,-8.2 r0 bottom
R204 "ERJ-2GEJ392X" resc1005n 13.3,-23.6 r180 top
R205 "RR0510P-302-D" resc1005n 82.2,-6.9 r0 bottom
R206 "ERJ-2GEJ392X" resc1005n 117.3,23.6 r0 top
R207 "RR0510P-302-D" resc1005n 84.3,-7.5 r90 bottom
R208 "ERJ-2GEJ392X" resc1005n 100.4,-23.5 r180 top
R209 "RR0510P-302-D" resc1005n 85.6,-7.5 r90 bottom
R210 "ERJ-2GEJ392X" resc1005n 58.9,-9.7 r90 bottom
R211 "RR0510P-302-D" resc1005n 86.9,-7.5 r90 bottom
R213 "RR0510P-302-D" resc1005n 88.2,-7.5 r90 bottom
R214 "RR0510P-122-D" resc1005n 31.4,22.3 r180 top
R215 "RR0510P-302-D" resc1005n 31.4,23.6 r0 top
R216 "RR0510P-122-D" resc1005n 9.5,-22.2 r180 top
R217 "RR0510P-302-D" resc1005n 9.5,-23.6 r0 top
R218 "RR0510P-122-D" resc1005n 120.3,22.2 r0 top
R219 "RR0510P-302-D" resc1005n 120.3,23.6 r180 top
R220 "RR0510P-122-D" resc1005n 97.2,-22.2 r180 top
R221 "RR0510P-302-D" resc1005n 97.2,-23.5 r0 top
R222 "HVC1206T5005JET" RESC3216N 127.1,3.9 r270 bottom
R223 "RR0510P-823-D" resc1005n 127.1,7.7 r270 bottom
R224 "HVC1206T5005JET" RESC3216N 119.1,3.9 r270 bottom
R225 "RR0510P-823-D" resc1005n 119.1,7.7 r270 bottom
R226 "HVC1206T5005JET" RESC3216N 99.2,0 r0 bottom
R227 "RR0510P-823-D" resc1005n 97.2,2.4 r270 bottom
R228 "RR0510P-103-D" resc1005n 90,7.1 r90 bottom
R229 "RR0510P-102-D" resc1005n 88.7,7.1 r270 bottom
R230 "ERJ-2GEJ201X" resc1005n 127.1,-5 r270 top
R231 "ERJ-2GEJ201X" resc1005n 119.1,-5 r270 top
R232 "ERJ-2GEJ201X" resc1005n 111.1,-5 r270 top
R233 "ERJ-2GEJ392X" resc1005n 28.4,22.3 r0 top
R234 "ERJ-2GEJ392X" resc1005n 13.3,-22.2 r180 top
R235 "ERJ-2GEJ392X" resc1005n 117.3,22.2 r0 top
R236 "ERJ-2GEJ392X" resc1005n 100.4,-22.2 r180 top
R237 "ERJ-2GEJ392X" resc1005n 99.3,9.5 r180 bottom
R238 "ERJ-2GEJ392X" resc1005n 68.9,4.8 r270 top
R239 "ERJ-2GEJ392X" resc1005n 31.3,10.7 r0 bottom
R240 "HVC1206T5005JET" RESC3216N 127.1,-1 r270 bottom
R241 "HVC1206T5005JET" RESC3216N 119.1,-1 r270 bottom
R242 "HVC1206T5005JET" RESC3216N 104.15,0 r0 bottom
R243 "ERJ-1GNF-1002C" RESC0603 41.65,2.45 r270 top
RT1 "NTCG063UH103HTBX" RESC0603 47.95,2.1 r270 top
RT2 "NTCG063UH103HTBX" RESC0603 84.8,0.95 r90 bottom
TP1 "1V2A" testpoint 12.5,-10.9 r180 top
TP2 "1V2B" testpoint 59.7,-7.9 r180 top
TP3 "1V2C" testpoint 73.5,12.5 r180 top
TP4 "1V2D" testpoint 102.9,-10.6 r180 top
TP5 "LV_RB" testpoint 36.8,-9.55 r180 top
TP6 "1V2_RB" testpoint 35.4,10.7 r180 top
TP7 "1V5A" testpoint 94,-7.8 r180 top
TP8 "1V5D" testpoint 92.4,-10.6 r180 top
TP9 "RX" testpoint 42.3,-2.5 r180 top
TP10 "TX" testpoint 42.25,7.25 r270 top
TP11 "1V0A" testpoint 11.5,11.6 r270 top
TP15 "I_1V5" testpoint 78.9,6.2 r270 top
TP16 "I_RX" testpoint 39.6,-7.3 r270 top
TP17 "I_TX" testpoint 39.6,2.4 r270 top

## Footprints (in the part's own frame and the unit in brackets; to place one, negate y for a bottom-side part, rotate by r counter-clockwise, add the part's x,y. Pads: shape width x height; smd on the part's side, far side on the other; paste and mask are expansions set on the pad)
BGA196C80P14X14_1200X1200X170 [mm] "BGA, 0.80mm Pitch, Square; 196 Pin, 14 Columns X 14 Rows, 12.00mm X 12.00mm X 1.70mm H"
  round 0.4 smd mask+0.051: A1(0,0) A2(0.8,0) A3(1.6,0) A4(2.4,0) A5(3.2,0) A6(4,0) A7(4.8,0) A8(5.6,0) A9(6.4,0) A10(7.2,0) A11(8,0) A12(8.8,0) A13(9.6,0) A14(10.4,0) B1(0,-0.8) B2(0.8,-0.8) B3(1.6,-0.8) B4(2.4,-0.8) B5(3.2,-0.8) B6(4,-0.8) B7(4.8,-0.8) B8(5.6,-0.8) B9(6.4,-0.8) B10(7.2,-0.8) B11(8,-0.8) B12(8.8,-0.8) B13(9.6,-0.8) B14(10.4,-0.8) C1(0,-1.6) C2(0.8,-1.6) C3(1.6,-1.6) C4(2.4,-1.6) C5(3.2,-1.6) C6(4,-1.6) C7(4.8,-1.6) C8(5.6,-1.6) C9(6.4,-1.6) C10(7.2,-1.6) C11(8,-1.6) C12(8.8,-1.6) C13(9.6,-1.6) C14(10.4,-1.6) D1(0,-2.4) D2(0.8,-2.4) D3(1.6,-2.4) D4(2.4,-2.4) D5(3.2,-2.4) D6(4,-2.4) D7(4.8,-2.4) D8(5.6,-2.4) D9(6.4,-2.4) D10(7.2,-2.4) D11(8,-2.4) D12(8.8,-2.4) D13(9.6,-2.4) D14(10.4,-2.4) E1(0,-3.2) E2(0.8,-3.2) E3(1.6,-3.2) E4(2.4,-3.2) E5(3.2,-3.2) E6(4,-3.2) E7(4.8,-3.2) E8(5.6,-3.2) E9(6.4,-3.2) E10(7.2,-3.2) E11(8,-3.2) E12(8.8,-3.2) E13(9.6,-3.2) E14(10.4,-3.2) F1(0,-4) F2(0.8,-4) F3(1.6,-4) F4(2.4,-4) F5(3.2,-4) F6(4,-4) F7(4.8,-4) F8(5.6,-4) F9(6.4,-4) F10(7.2,-4) F11(8,-4) F12(8.8,-4) F13(9.6,-4) F14(10.4,-4) G1(0,-4.8) G2(0.8,-4.8) G3(1.6,-4.8) G4(2.4,-4.8) G5(3.2,-4.8) G6(4,-4.8) G7(4.8,-4.8) G8(5.6,-4.8) G9(6.4,-4.8) G10(7.2,-4.8) G11(8,-4.8) G12(8.8,-4.8) G13(9.6,-4.8) G14(10.4,-4.8) H1(0,-5.6) H2(0.8,-5.6) H3(1.6,-5.6) H4(2.4,-5.6) H5(3.2,-5.6) H6(4,-5.6) H7(4.8,-5.6) H8(5.6,-5.6) H9(6.4,-5.6) H10(7.2,-5.6) H11(8,-5.6) H12(8.8,-5.6) H13(9.6,-5.6) H14(10.4,-5.6) J1(0,-6.4) J2(0.8,-6.4) J3(1.6,-6.4) J4(2.4,-6.4) J5(3.2,-6.4) J6(4,-6.4) J7(4.8,-6.4) J8(5.6,-6.4) J9(6.4,-6.4) J10(7.2,-6.4) J11(8,-6.4) J12(8.8,-6.4) J13(9.6,-6.4) J14(10.4,-6.4) K1(0,-7.2) K2(0.8,-7.2) K3(1.6,-7.2) K4(2.4,-7.2) K5(3.2,-7.2) K6(4,-7.2) K7(4.8,-7.2) K8(5.6,-7.2) K9(6.4,-7.2) K10(7.2,-7.2) K11(8,-7.2) K12(8.8,-7.2) K13(9.6,-7.2) K14(10.4,-7.2) L1(0,-8) L2(0.8,-8) L3(1.6,-8) L4(2.4,-8) L5(3.2,-8) L6(4,-8) L7(4.8,-8) L8(5.6,-8) L9(6.4,-8) L10(7.2,-8) L11(8,-8) L12(8.8,-8) L13(9.6,-8) L14(10.4,-8) M1(0,-8.8) M2(0.8,-8.8) M3(1.6,-8.8) M4(2.4,-8.8) M5(3.2,-8.8) M6(4,-8.8) M7(4.8,-8.8) M8(5.6,-8.8) M9(6.4,-8.8) M10(7.2,-8.8) M11(8,-8.8) M12(8.8,-8.8) M13(9.6,-8.8) M14(10.4,-8.8) N1(0,-9.6) N2(0.8,-9.6) N3(1.6,-9.6) N4(2.4,-9.6) N5(3.2,-9.6) N6(4,-9.6) N7(4.8,-9.6) N8(5.6,-9.6) N9(6.4,-9.6) N10(7.2,-9.6) N11(8,-9.6) N12(8.8,-9.6) N13(9.6,-9.6) N14(10.4,-9.6) P1(0,-10.4) P2(0.8,-10.4) P3(1.6,-10.4) P4(2.4,-10.4) P5(3.2,-10.4) P6(4,-10.4) P7(4.8,-10.4) P8(5.6,-10.4) P9(6.4,-10.4) P10(7.2,-10.4) P11(8,-10.4) P12(8.8,-10.4) P13(9.6,-10.4) P14(10.4,-10.4)
  silkscreen extent -0.8,-11.2 11.2,0.8, body extent -0.8,-11.2 11.2,0.8, height 1.7
BGA289X17 [mm]
  round 0.27 smd: A1(0,0) A2(0.5,0) A3(1,0) A4(1.5,0) A5(2,0) A6(2.5,0) A7(3,0) A8(3.5,0) A9(4,0) A10(4.5,0) A11(5,0) A12(5.5,0) A13(6,0) A14(6.5,0) A15(7,0) A16(7.5,0) A17(8,0) B1(0,-0.5) B2(0.5,-0.5) B3(1,-0.5) B4(1.5,-0.5) B5(2,-0.5) B6(2.5,-0.5) B7(3,-0.5) B8(3.5,-0.5) B9(4,-0.5) B10(4.5,-0.5) B11(5,-0.5) B12(5.5,-0.5) B13(6,-0.5) B14(6.5,-0.5) B15(7,-0.5) B16(7.5,-0.5) B17(8,-0.5) C1(0,-1) C2(0.5,-1) C3(1,-1) C4(1.5,-1) C5(2,-1) C6(2.5,-1) C7(3,-1) C8(3.5,-1) C9(4,-1) C10(4.5,-1) C11(5,-1) C12(5.5,-1) C13(6,-1) C14(6.5,-1) C15(7,-1) C16(7.5,-1) C17(8,-1) D1(0,-1.5) D2(0.5,-1.5) D3(1,-1.5) D4(1.5,-1.5) D5(2,-1.5) D6(2.5,-1.5) D7(3,-1.5) D8(3.5,-1.5) D9(4,-1.5) D10(4.5,-1.5) D11(5,-1.5) D12(5.5,-1.5) D13(6,-1.5) D14(6.5,-1.5) D15(7,-1.5) D16(7.5,-1.5) D17(8,-1.5) E1(0,-2) E2(0.5,-2) E3(1,-2) E4(1.5,-2) E5(2,-2) E6(2.5,-2) E7(3,-2) E8(3.5,-2) E9(4,-2) E10(4.5,-2) E11(5,-2) E12(5.5,-2) E13(6,-2) E14(6.5,-2) E15(7,-2) E16(7.5,-2) E17(8,-2) F1(0,-2.5) F2(0.5,-2.5) F3(1,-2.5) F4(1.5,-2.5) F5(2,-2.5) F6(2.5,-2.5) F7(3,-2.5) F8(3.5,-2.5) F9(4,-2.5) F10(4.5,-2.5) F11(5,-2.5) F12(5.5,-2.5) F13(6,-2.5) F14(6.5,-2.5) F15(7,-2.5) F16(7.5,-2.5) F17(8,-2.5) G1(0,-3) G2(0.5,-3) G3(1,-3) G4(1.5,-3) G5(2,-3) G6(2.5,-3) G7(3,-3) G8(3.5,-3) G9(4,-3) G10(4.5,-3) G11(5,-3) G12(5.5,-3) G13(6,-3) G14(6.5,-3) G15(7,-3) G16(7.5,-3) G17(8,-3) H1(0,-3.5) H2(0.5,-3.5) H3(1,-3.5) H4(1.5,-3.5) H5(2,-3.5) H6(2.5,-3.5) H7(3,-3.5) H8(3.5,-3.5) H9(4,-3.5) H10(4.5,-3.5) H11(5,-3.5) H12(5.5,-3.5) H13(6,-3.5) H14(6.5,-3.5) H15(7,-3.5) H16(7.5,-3.5) H17(8,-3.5) J1(0,-4) J2(0.5,-4) J3(1,-4) J4(1.5,-4) J5(2,-4) J6(2.5,-4) J7(3,-4) J8(3.5,-4) J9(4,-4) J10(4.5,-4) J11(5,-4) J12(5.5,-4) J13(6,-4) J14(6.5,-4) J15(7,-4) J16(7.5,-4) J17(8,-4) K1(0,-4.5) K2(0.5,-4.5) K3(1,-4.5) K4(1.5,-4.5) K5(2,-4.5) K6(2.5,-4.5) K7(3,-4.5) K8(3.5,-4.5) K9(4,-4.5) K10(4.5,-4.5) K11(5,-4.5) K12(5.5,-4.5) K13(6,-4.5) K14(6.5,-4.5) K15(7,-4.5) K16(7.5,-4.5) K17(8,-4.5) L1(0,-5) L2(0.5,-5) L3(1,-5) L4(1.5,-5) L5(2,-5) L6(2.5,-5) L7(3,-5) L8(3.5,-5) L9(4,-5) L10(4.5,-5) L11(5,-5) L12(5.5,-5) L13(6,-5) L14(6.5,-5) L15(7,-5) L16(7.5,-5) L17(8,-5) M1(0,-5.5) M2(0.5,-5.5) M3(1,-5.5) M4(1.5,-5.5) M5(2,-5.5) M6(2.5,-5.5) M7(3,-5.5) M8(3.5,-5.5) M9(4,-5.5) M10(4.5,-5.5) M11(5,-5.5) M12(5.5,-5.5) M13(6,-5.5) M14(6.5,-5.5) M15(7,-5.5) M16(7.5,-5.5) M17(8,-5.5) N1(0,-6) N2(0.5,-6) N3(1,-6) N4(1.5,-6) N5(2,-6) N6(2.5,-6) N7(3,-6) N8(3.5,-6) N9(4,-6) N10(4.5,-6) N11(5,-6) N12(5.5,-6) N13(6,-6) N14(6.5,-6) N15(7,-6) N16(7.5,-6) N17(8,-6) P1(0,-6.5) P2(0.5,-6.5) P3(1,-6.5) P4(1.5,-6.5) P5(2,-6.5) P6(2.5,-6.5) P7(3,-6.5) P8(3.5,-6.5) P9(4,-6.5) P10(4.5,-6.5) P11(5,-6.5) P12(5.5,-6.5) P13(6,-6.5) P14(6.5,-6.5) P15(7,-6.5) P16(7.5,-6.5) P17(8,-6.5) R1(0,-7) R2(0.5,-7) R3(1,-7) R4(1.5,-7) R5(2,-7) R6(2.5,-7) R7(3,-7) R8(3.5,-7) R9(4,-7) R10(4.5,-7) R11(5,-7) R12(5.5,-7) R13(6,-7) R14(6.5,-7) R15(7,-7) R16(7.5,-7) R17(8,-7) T1(0,-7.5) T2(0.5,-7.5) T3(1,-7.5) T4(1.5,-7.5) T5(2,-7.5) T6(2.5,-7.5) T7(3,-7.5) T8(3.5,-7.5) T9(4,-7.5) T10(4.5,-7.5) T11(5,-7.5) T12(5.5,-7.5) T13(6,-7.5) T14(6.5,-7.5) T15(7,-7.5) T16(7.5,-7.5) T17(8,-7.5) U1(0,-8) U2(0.5,-8) U3(1,-8) U4(1.5,-8) U5(2,-8) U6(2.5,-8) U7(3,-8) U8(3.5,-8) U9(4,-8) U10(4.5,-8) U11(5,-8) U12(5.5,-8) U13(6,-8) U14(6.5,-8) U15(7,-8) U16(7.5,-8) U17(8,-8)
  silkscreen extent -0.5,-8.5 8.5,0.5, body extent -0.5,-8.5 8.5,0.5, height 1.3
CAPC0603N [mm] "Chip Capacitor, 2-Leads, Body 0.60x0.30mm, IPC Medium Density"
  rect 0.52x0.42 smd: 1(-0.31,0) 2(0.31,0)
  body extent -0.32,-0.17 0.32,0.17, height 0.3
capc1005n [mm] "Chip Capacitor, Body 1.0x0.5mm, IPC Medium Density"
  rect 0.8x0.6 smd: 1(-0.6,0) 2(0.6,0)
  silkscreen extent -1.3,-0.2 -1.3,0.2, body extent -0.55,-0.3 0.55,0.3, height 0.6
CAPC1005N [mm] "Chip Capacitor, Body 1.0x0.5mm, IPC Medium Density"
  rect 0.8x0.6 smd: 1(-0.6,0) 2(0.6,0)
  silkscreen extent -1.3,-0.2 -1.3,0.2, body extent -0.55,-0.3 0.55,0.3, height 0.6
CAPC1608N [mm] "Chip Capacitor, Body 1.6x0.8mm, IPC Medium Density"
  rect 1x1 smd: 1(-0.8,0) 2(0.8,0)
  silkscreen extent -1.6,-0.4 -1.6,0.4, body extent -0.87,-0.48 0.87,0.48, height 0.55
capc2012n [mm] "Chip Capacitor, Body 2.0x1.3mm, IPC Medium Density"
  rect 1.3x1.5 smd: 1(-0.85,0) 2(0.85,0)
  silkscreen extent -1.8,-0.65 -1.8,0.65, body extent -1.1,-0.72 1.1,0.72, height 1.1
CONTACT [mm]
  rect 1.85x0.9 smd: 1(0,0)
  silkscreen extent -2,-0.6 1.2,0.6, body extent -1.92,-0.5 1.34,0.5, height 1.24
DF57-2 [mm]
  rect 0.6x0.85 smd: 1(0,0) 2(1.2,0)
  rect 0.7x0.8 smd: 3(2.35,3.775) 4(-1.15,3.775)
  silkscreen extent -1.5,-0.4 2.7,3, body extent -1.5,0 2.7,3.8, height 1.6
DF57-3 [mm]
  rect 0.6x0.85 smd: 1(0,0) 2(1.2,0) 3(2.4,0)
  rect 0.7x0.8 smd: 4(3.55,3.775) 5(-1.15,3.775)
  silkscreen extent -1.5,-0.4 3.9,3, body extent -1.5,-0.25 3.9,4, height 1.6
DF57-5 [mm]
  rect 0.6x0.85 smd: 1(0,0) 2(1.2,0) 3(2.4,0) 4(3.6,0) 5(4.8,0)
  rect 0.7x0.8 smd: 6(5.95,3.775) 7(-1.15,3.775)
  silkscreen extent -1.5,-0.4 6.3,3, body extent -1.5,-0.25 6.3,4, height 1.6
DF57-6 [mm]
  rect 0.6x0.85 smd: 1(0,0) 2(1.2,0) 3(2.4,0) 4(3.6,0) 5(4.8,0) 6(6,0)
  rect 0.7x0.8 smd: 7(7.15,3.775) 8(-1.15,3.775)
  silkscreen extent -1.5,-0.4 7.5,3, body extent -1.5,-0.25 7.5,4, height 1.6
JMP2PCB#1 [mm]
  round 0.2 smd paste-1 mask-1: 1(0,-0.5) 2(0,0.45)
  oval 1.4x1.8 on Bottom Solder paste-1 mask-1: 9(0,0)
  Top Layer lines w0.254: -0.25,-0.45 -0.166,-0.45 ; 0.25,-0.45 0.166,-0.45 ; -0.3,0.2 cw(c0,0.2) 0.3,0.2 ; -0.25,0.45 0.25,0.45 ; -0.166,-0.45 ccw(c0,-0.2) 0,-0.5 ccw(c0,-0.2) 0.166,-0.45 ; -0.166,-0.45 cw(c0,-0.2) -0.3,-0.2 ; -0.166,-0.45 0,-0.45 0.166,-0.45 ; 0.166,-0.45 ccw(c0,-0.2) 0.3,-0.2 ; -0.3,-0.2 0.3,-0.2 ; -0.3,-0.2 -0.5,-0.2 ccw(c0,-0.2) -0.433,-0.45 ccw(c0,-0.2) 0.05,-0.697 ccw(c0,-0.2) 0.477,-0.35 ccw(c0,-0.2) 0.5,-0.2 0.3,-0.2 ; -0.5,0.2 cw(c0,0.2) 0.5,0.2 -0.5,0.2
JMP2PCB#2 [mm]
  round 0.2 smd paste-1 mask-1: 1(0,-0.5) 2(0,0.45)
  oval 1.4x1.8 on Bottom Solder paste-1 mask-1: 9(0,0)
  Top Layer lines w0.254: -0.25,-0.45 -0.166,-0.45 ; 0.25,-0.45 0.166,-0.45 ; -0.3,0.2 cw(c0,0.2) -0.166,0.45 ; 0.3,0.2 ccw(c0,0.2) 0.166,0.45 ; -0.25,0.45 -0.166,0.45 ; 0.25,0.45 0.166,0.45 ; -0.166,-0.45 ccw(c0,-0.2) 0,-0.5 ccw(c0,-0.2) 0.166,-0.45 ; -0.166,-0.45 cw(c0,-0.2) -0.3,-0.2 ; -0.166,-0.45 0,-0.45 0.166,-0.45 ; 0.166,-0.45 ccw(c0,-0.2) 0.3,-0.2 ; -0.3,-0.2 -0.5,-0.2 ccw(c0,-0.2) -0.433,-0.45 ccw(c0,-0.2) 0.05,-0.697 ccw(c0,-0.2) 0.5,-0.2 0.3,-0.2 ; -0.3,-0.2 0.3,-0.2 ; -0.166,0.45 cw(c0,0.2) 0.166,0.45 ; -0.166,0.45 0,0.45 0.166,0.45 ; -0.5,0.2 cw(c0,0.2) 0.166,0.672 cw(c0,0.2) 0.5,0.2 -0.5,0.2
LED_RED [mm] "LTST-C194KRKT"
  rect 0.8x0.8 smd: 1(0,0) 2(1.5,0)
  body extent -0.1,-0.45 1.6,0.45, height 0.6
RESC0603 [mm]
  rect 0.35x0.4 smd: 1(0,0) 2(0.65,0)
  body extent 0,-0.15 0.65,0.15, height 0.5
resc0603 [mm]
  rect 0.35x0.4 smd: 1(0,0) 2(0.65,0)
  body extent 0,-0.15 0.65,0.15, height 0.5
resc1005n [mm] "Chip Resistor, Body 1.1x0.5mm, IPC Medium Density"
  rect 0.8x0.7 smd: 1(-0.6,0) 2(0.6,0)
  body extent -0.55,-0.3 0.55,0.3, height 0.4
RESC3216N [mm] "Chip Resistor, Body 3.2x1.6mm, IPC Medium Density"
  rect 1.3x1.8 smd: 1(-1.45,0) 2(1.45,0)
  silkscreen extent -0.4,-0.8 0.4,0.8, body extent -1.68,-0.87 1.68,0.87, height 0.55
SOT-23 [mm]
  rect 0.6x1.25 smd: 1(0,0) 2(1.9,0) 3(0.95,2)
  silkscreen extent 0,0 1.9,2, body extent 0,0.3 1.9,1.7, height 1.2
testpoint [mil]
  round 40 smd paste-39.37: 1(0,0)
  silkscreen extent -39,-39 39,39
VENKEL0805 [mm]
  rect 1.1x1.2 smd: 1(0,0) 2(1.9,0)
  body extent -0.75,-0.8 2.65,0.8, height 1.7
VTRX+ [mm]
  rect 0.2x1.12 smd: 1(0,0) 2(0,2.66) 3(0.4,0) 4(0.4,2.66) 5(0.8,0) 6(0.8,2.66) 7(1.2,0) 8(1.2,2.66) 9(1.6,0) 10(1.6,2.66) 11(2,0) 12(2,2.66) 13(2.4,0) 14(2.4,2.66) 15(2.8,0) 16(2.8,2.66) 17(3.2,0) 18(3.2,2.66) 19(3.6,0) 20(3.6,2.66) 21(4,0) 22(4,2.66) 23(4.4,0) 24(4.4,2.66) 25(4.8,0) 26(4.8,2.66) 27(5.2,0) 28(5.2,2.66) 29(5.6,0) 30(5.6,2.66) 31(6,0) 32(6,2.66) 33(6.4,0) 34(6.4,2.66) 35(6.8,0) 36(6.8,2.66) 37(7.2,0) 38(7.2,2.66) 39(7.6,0) 40(7.6,2.66)
  silkscreen extent -1.2,-2.6 8.8,17.4, body extent -1.2,-2.6 8.8,17.4, height 2
WDFNX208 [mm]
  rect 0.3x0.5 smd: 1(0,0) 2(0.5,0) 3(1,0) 4(1.5,0) 5(1.5,1.8) 6(1,1.8) 7(0.5,1.8) 8(0,1.8)
  rect 1.6x0.9 smd: 9(0.75,0.9)
  silkscreen extent -0.57,-0.07 1.73,1.35, body extent -0.25,-0.12 1.75,1.87, height 0.8
WP7B-40P [mm]
  rect 0.22x0.55 smd: 1(0,0) 2(0.4,0) 3(0.8,0) 4(1.2,0) 5(1.6,0) 6(2,0) 7(2.4,0) 8(2.8,0) 9(3.2,0) 10(3.6,0) 11(4,0) 12(4.4,0) 13(4.8,0) 14(5.2,0) 15(5.6,0) 16(6,0) 17(6.4,0) 18(6.8,0) 19(7.2,0) 20(7.6,0) 21(7.6,1.85) 22(7.2,1.85) 23(6.8,1.85) 24(6.4,1.85) 25(6,1.85) 26(5.6,1.85) 27(5.2,1.85) 28(4.8,1.85) 29(4.4,1.85) 30(4,1.85) 31(3.6,1.85) 32(3.2,1.85) 33(2.8,1.85) 34(2.4,1.85) 35(2,1.85) 36(1.6,1.85) 37(1.2,1.85) 38(0.8,1.85) 39(0.4,1.85) 40(0,1.85) 41(-0.4,0) 42(8,0) 43(8,1.85) 44(-0.4,1.85)
  silkscreen extent -0.65,-1 8.25,2.3, body extent -1.5,-0.32 9.1,2.17, height 0.5

## Part data
C105 C106 C107 C108 C109 C111 C112 C113 C114 C115 C116 C117 C118 C119 C120 C121 C122 C123 C124 C125 C126 C127 C128 C129 C130 C131 C132 C133 C134 C135 C136 C138 C139 C140 C141 C150 C151 C152 C153 C154 C155 C160 C162 C163 C164 C165 C166 C167 C168 C169 C201 C202 C203 C204 C205 C206 C207 C208 C209 C210 C211 C212 C213 C214 C215 C216 C217 C218 C219 C220 C221 C222 C223 C224 C225 C226 C227 C228 C229 C230 C231 C232 C233: library part C, "CERAMIC CAPACITOR"
CT1 CT2 CT3: library part CONTACT
D1: library part LED2, "Typical RED, GREEN, YELLOW, AMBER GaAs LED", LatestRevisionDate=17-Jul-2002, LatestRevisionNote="Re-released for DXP Platform.", PackageDescription="SM LED; 2 Flat Leads", PackageReference=3.2X1.6X1.1, PackageVersion=Feb-2002, Published=8-Jun-2000, Publisher="Altium Limited"
IC1 IC4: "Low Power Gigabit Transceiver", Case=BGA289, Manufacturer=CERN, Bonding=No, Component Type=Standard, Device=LPGBT, LatestRevisionDate=26.10.2018, Manufacturer Part Number=LPGBT, Mounted=Yes, PackageDescription="BGA, 289-Leads, Body 9.00x9.00mmx1.28mm, Pitch 0.50mm", Part Description="Low Power Gigabit Transceiver", Part Number=LPGBT, Pin Count=289, Pinout Version=180226, SMD=Yes, Socket=No
IC2: library part VTRX+_DF40C-2.0-40DS-0.4V, "VTRX+ module with 2.5mm stack Height.", Parameter 1=VTRX+
IC3: library part "CERN_GBT-SCA_REV 6.2", "The Slow Control Adapter ASIC for the GBT System", Device=GBT-SCA
JMP1 JMP2: library part JMP2, "printed on PCB"
P1 P2 P3 P14 P15: library part "Header 8", "Header, 8-Pin", LatestRevisionDate=17-Jul-2002, LatestRevisionNote="Re-released for DXP Platform.", Publisher="Altium Limited"
P4 P16 P17: library part "Header 4", "Header, 4-Pin", LatestRevisionDate=17-Jul-2002, LatestRevisionNote="Re-released for DXP Platform.", Publisher="Altium Limited"
P5 P6 P7 P8 P9 P10: library part WP7B-40P, "plug"
P11: library part "Header 7", "Header, 7-Pin", LatestRevisionDate=17-Jul-2002, LatestRevisionNote="Re-released for DXP Platform.", Publisher="Altium Limited"
P12: library part "Header 5", "Header, 5-Pin", LatestRevisionDate=17-Jul-2002, LatestRevisionNote="Re-released for DXP Platform.", Publisher="Altium Limited"
Q1: library part NPN, "NPN Bipolar Transistor", Code_JEDEC=TO-226-AA, LatestRevisionDate=17-Jul-2002, LatestRevisionNote="Re-released for DXP Platform.", PackageDescription="TO, Flat Index; 3 In-Line, Axial Leads; Body Dia. 4.8mm; Leads 0.55 x 0.51 mm (max)", PackageReference=TO-226-AA, Published=8-Jun-2000, Publisher="Altium Limited"
R101 R102 R103 R104 R105 R106 R107 R109 R110 R111 R112 R113 R114 R115 R116 R117 R118 R119 R120 R122 R123 R124 R125 R126 R127 R128 R129 R130 R131 R132 R133 R134 R135 R141 R142 R143 R144 R145 R146 R147 R148 R201 R202 R203 R204 R205 R206 R207 R208 R209 R210 R211 R213 R214 R215 R216 R217 R218 R219 R220 R221 R222 R223 R224 R225 R226 R227 R228 R229 R230 R231 R232 R233 R234 R235 R236 R237 R238 R239 R240 R241 R242 R243: library part R1, "FILM RESISTOR"
  R101 R102 R107 R109 R110 R132 R143 R202 R204 R206 R208 R210 R233 R234 R235 R236 R237 R238 R239: Parameter 1=3.9K, Text Field2=5%
  R103 R104: Parameter 1=2K, Text Field2=5%
  R105 R106: Parameter 1=3.9K, Text Field2=1%
  R111 R112 R113 R114 R115 R116 R117 R118 R119 R120 R122 R123 R124 R125 R126 R127 R128 R129 R130 R131 R133 R134 R135 R144 R145 R203 R205 R207 R209 R211 R213 R214 R215 R216 R217 R218 R219 R220 R221 R222 R223 R224 R225 R226 R227 R228 R229 R240 R241 R242 R243: Text Field2=1%
  R141: Parameter 1=510, Text Field2=5%
  R142: Parameter 1=1K, Text Field2=5%
  R146: Parameter 1=402K, Text Field2=1%
  R147: Parameter 1=1M, Text Field2=1%
  R148: Parameter 1=4.75K, Text Field2=1%
  R201 R230 R231 R232: Parameter 1=200, Text Field2=5%
RT1 RT2: library part "Res Thermal", "Thermistor", Code_IPC=RESC2012, LatestRevisionDate=29-May-2009, LatestRevisionNote="IPC-7351 Footprint Added.", PackageDescription="Chip Resistor 0805 Case Size", PackageReference=6-0805, PackageVersion=Mar-2003, Published=24-Mar-1999, Publisher="Altium Limited"
TP1 TP2 TP3 TP4 TP5 TP6 TP7 TP8 TP9 TP10 TP11 TP15 TP16 TP17: library part TP, "TEST POINT 40MIL DIA."

## Free pads (board coordinates)
  round 0.4 hole 0.25 mask+0.051: 1(11.25,0) 1(25.7,3.6) 1(25.8,-8.4) 1(26.7,-6.8) 1(27.45,0.6) 1(27.45,1.8) 1(27.5,-3) 1(27.5,-1.8) 1(27.6,-1) 1(27.6,-0.35) 1(27.6,2.8) 1(28,-1.4) 1(28.4,-7.2) 1(28.4,-3.8) 1(28.4,-3) 1(28.4,-1.8) 1(28.5,-0.6) 1(28.5,0.6) 1(28.5,1.8) 1(28.5,3) 1(29,-8.4) 1(61.875,-5.875) 1(62.875,-5.875) 1(65.6,0.9) 1(68.6,3) 1(68.9,6.9) 1(69.1,2.5) 1(69.6,-1.8) 1(70,-3.75) 1(85.1,-2.45) 1(85.15,-0.85) 1(96.4,-3.2) 1(96.4,-4.8) 1(96.4,-4) 1(96.4,-2.4) 1(96.4,-1.6) 1(96.4,-0.8) 1(96.4,0.8) 1(96.4,1.6) 1(105.531,5.569) 1(110.2,-1.3) 1(114,6.5) 1(117.9,-2.4) 1(119.1,9.2) 1(119.1,6.4) 1(125.9,-2.4) 1(127.1,9.2) 1(127.1,6.3)
  round 0.25 / inner round 0.35 / far side round 0.35 hole 0.15 mask+0.051: 1(51.35,2.9) 1(51.75,1.75) 1(51.75,-0.25) 1(52.25,-1.75) 1(52.25,-1.25) 1(52.25,-0.75) 1(52.25,0.25) 1(52.25,0.75) 1(52.25,1.25) 1(52.25,-0.25) 1(52.75,-1.75) 1(52.75,-0.75) 1(52.75,-1.25) 1(52.75,-0.25) 1(52.75,1.25) 1(52.75,2.25) 1(52.75,3.25) 1(53.25,0.25) 1(53.25,1.25) 1(53.25,-0.75) 1(53.25,-0.25) 1(53.25,0.75) 1(53.25,3.25) 1(53.25,-1.75) 1(53.25,-1.25) 1(53.25,2.25) 1(53.25,-3.25) 1(53.25,-2.75) 1(53.5,-4.4) 1(53.75,-3.75) 1(53.75,0.75) 1(53.75,1.25) 1(53.75,-2.75) 1(53.75,2.25) 1(53.75,2.75) 1(54.25,-3.25) 1(54.25,-2.75) 1(54.25,-0.25) 1(54.25,-1.75) 1(54.25,-0.75) 1(54.25,3.25) 1(54.25,0.25) 1(54.251,1.226) 1(54.275,2.25) 1(54.75,0.25) 1(54.75,0.75) 1(54.75,1.25) 1(54.75,-0.75) 1(54.75,-0.25) 1(54.775,2.25) 1(55.25,-3.25) 1(55.25,-2.75) 1(55.25,-0.75) 1(55.25,0.25) 1(55.25,0.75) 1(55.25,1.25) 1(55.25,-1.75) 1(55.25,-0.25) 1(55.25,-1.25) 1(55.75,2.75) 1(55.75,3.25) 1(55.75,-3.75) 1(55.75,-0.75) 1(55.75,0.25) 1(55.75,0.75) 1(55.75,1.25) 1(55.75,-0.25) 1(55.75,-4.25) 1(55.75,-2.75) 1(56.25,-0.25) 1(56.25,-1.75) 1(56.25,-1.25) 1(56.25,2.75) 1(56.25,-3.25) 1(56.25,-2.75) 1(56.5,-4.4) 1(56.75,2.75) 1(56.75,3.25) 1(56.75,-0.25) 1(56.75,-3.75) 1(56.75,0.75) 1(56.75,1.25) 1(56.75,-1.25) 1(57.25,0.75) 1(57.25,1.25) 1(57.25,-0.25) 1(57.25,-2.75) 1(57.25,-0.75) 1(57.25,2.75) 1(57.75,2.75) 1(57.75,3.25) 1(57.75,-3.25) 1(57.75,-2.75) 1(57.75,-0.25) 1(57.75,0.75) 1(57.75,1.25) 1(57.75,-1.75) 1(57.75,-1.25) 1(57.75,-0.75) 1(58.25,0.25) 1(58.25,0.75) 1(58.25,1.25) 1(58.25,-0.75) 1(58.25,-1.25) 1(58.25,-1.75) 1(58.25,-0.25) 1(58.25,2.75) 1(58.25,3.25) 1(58.75,-3.25) 1(58.75,-2.75) 1(58.75,-1.75) 1(58.75,2.75) 1(58.75,3.25) 1(58.75,3.75) 1(58.752,4.25) 1(59.248,-3.771) 1(59.248,3.238) 1(59.25,2.75) 1(59.25,-3.25) 1(59.25,-1.75) 1(59.25,-1.25) 1(59.25,-0.75) 1(59.25,-0.25) 1(59.25,0.25) 1(59.25,3.75) 1(59.25,4.25) 1(59.75,-3.75) 1(59.75,-3.25) 1(59.75,3.25) 1(59.75,4.25) 1(59.75,-4.25) 1(59.75,-1.75) 1(59.75,-0.25) 1(59.75,3.75) 1(60.25,-3.25) 1(60.25,4.25) 1(60.25,3.25) 1(70.6,0.5) 1(70.6,1) 1(70.75,-1.75) 1(70.75,-0.75) 1(70.75,-0.25) 1(70.75,1.75) 1(71.25,-3.75) 1(71.25,-3.25) 1(71.25,-2.75) 1(71.25,0.75) 1(71.25,-1.75) 1(71.25,-0.75) 1(71.25,-0.25) 1(71.25,1.25) 1(71.25,1.75) 1(71.75,-0.25) 1(71.75,-3.75) 1(71.75,-2.75) 1(71.75,1.25) 1(71.75,1.75) 1(71.75,-3.25) 1(71.75,-1.75) 1(71.75,-0.75) 1(72.25,-0.25) 1(72.25,-2.75) 1(72.25,-1.75) 1(72.25,-1.25) 1(72.25,-0.75) 1(72.25,0.75) 1(72.25,2.25) 1(72.75,-3.25) 1(72.75,2.25) 1(72.75,1.25) 1(72.75,1.75) 1(72.75,-3.75) 1(73.25,-4.25) 1(73.25,-0.25) 1(73.25,-3.75) 1(73.25,-0.75) 1(73.25,0.25) 1(73.25,0.75) 1(73.75,-0.75) 1(73.75,-0.25) 1(73.75,-3.25) 1(73.75,0.25) 1(73.75,0.75) 1(73.75,1.25) 1(73.75,-3.75) 1(74.25,-4.25) 1(74.25,-0.25) 1(74.25,1.25) 1(74.25,3.75) 1(74.25,4.25) 1(74.25,-0.75) 1(74.255,-3.755) 1(74.75,-0.25) 1(74.75,0.25) 1(74.75,0.75) 1(74.75,1.25) 1(74.75,3.75) 1(74.75,-2.25) 1(74.75,-0.75) 1(74.75,3.25) 1(75.25,-0.75) 1(75.25,0.75) 1(75.25,1.25) 1(75.25,4.25) 1(75.25,-1.25) 1(75.25,0.25) 1(75.25,3.75) 1(75.75,0.75) 1(75.75,1.25) 1(75.75,3.75) 1(75.75,-3.25) 1(75.75,-2.75) 1(75.75,-1.25) 1(75.75,-0.75) 1(75.75,3.25) 1(75.75,-3.75) 1(76.25,-4.25) 1(76.25,0.25) 1(76.25,0.75) 1(76.25,1.25) 1(76.25,4.25) 1(76.25,-3.75) 1(76.25,3.75) 1(76.75,0.25) 1(76.75,0.75) 1(76.75,1.25) 1(76.75,3.75) 1(76.75,-3.75) 1(76.75,-3.25) 1(76.75,-2.75) 1(76.75,-1.25) 1(76.75,-0.75) 1(76.75,-0.25) 1(76.75,3.25) 1(77.25,-4.25) 1(77.25,0.25) 1(77.25,0.75) 1(77.25,4.25) 1(77.25,-3.75) 1(77.25,-1.25) 1(77.25,-0.75) 1(77.25,-0.25) 1(77.25,1.25) 1(77.25,3.75) 1(77.75,3.75) 1(77.75,-2.75) 1(77.75,1.75) 1(77.75,3.25) 1(78.25,-2.25) 1(78.25,-1.75) 1(78.25,0.75) 1(78.25,1.25) 1(78.25,1.75) 1(78.25,-2.75) 1(78.75,-1.75) 1(78.75,-2.25) 1(78.75,-1.25) 1(78.75,0.25) 1(78.75,0.75) 1(78.75,1.25) 1(78.75,1.75) 1(78.75,-2.75) 1(79.25,-1.25) 1(79.25,0.25)
  round 0.48 hole 0.3 mask+0.051: 1(85.2,-1.6) 1(85.2,3.2) 1(86,2.4) 1(86,0.8) 1(86.8,0.8) 1(86.8,2.4) 1(87.6,-3.2) 1(87.6,-2.4) 1(87.6,-1.6) 1(87.6,-0.8) 1(87.6,0) 1(87.6,0.8) 1(87.6,-4) 1(87.6,3.2) 1(88.4,0.8) 1(88.4,1.6) 1(88.4,2.4) 1(88.4,-0.8) 1(88.4,0) 1(88.4,-2.4) 1(88.4,-1.6) 1(88.4,-4.8) 1(88.4,-4) 1(89.2,-4.8) 1(89.2,-4) 1(89.2,-3.2) 1(89.2,1.6) 1(89.2,2.4) 1(89.2,-5.6) 1(89.2,-2.4) 1(89.2,-1.6) 1(89.2,-0.8) 1(89.2,0) 1(89.2,0.8) 1(90,-4.8) 1(90,0) 1(90,0.8) 1(90,-4) 1(90,1.6) 1(90,2.4) 1(90,-5.6) 1(90.8,-2.4) 1(90.8,-5.6) 1(90.8,-4.8) 1(90.8,-4) 1(90.8,-3.2) 1(90.8,2.4) 1(90.8,-1.6) 1(90.8,-0.8) 1(91.6,-2.4) 1(91.6,-5.6) 1(91.6,-4.8) 1(91.6,-4) 1(91.6,-3.2) 1(91.6,-1.6) 1(91.6,1.6) 1(91.6,2.4) 1(91.6,0) 1(91.6,0.8) 1(92.4,0.8) 1(92.4,1.6) 1(92.4,2.4) 1(92.4,3.2) 1(92.4,-2.4) 1(92.4,-1.6) 1(92.4,-0.8) 1(92.4,0) 1(93.2,-3.2) 1(93.2,-2.4) 1(93.2,-1.6) 1(93.2,0) 1(93.2,0.8) 1(93.2,1.6) 1(93.2,2.4) 1(93.2,3.2) 1(94,-3.2) 1(94,0) 1(94,0.8) 1(94,1.6) 1(94,2.4) 1(94,3.2) 1(94,-1.6) 1(94,-0.8)

## Via types
v1: diameter 0.4, hole 0.25, Top Layer to Bottom Layer, 1009 vias

## Nets (pads, with @x,y where several pads share a name; then routed paths per layer and width w, separated by ;. In a path a pad name is that pad's centre, name@x,y a point inside that pad or via, vN(x,y) a via of type N, cw(c..) or ccw(c..) an arc to the next point about the centre after c; other vN are vias at no path point)
1V0A: P5.20 P7.20 P9.20 R201.1 TP11.1 | length 176.1
  Top Layer w0.102: TP11.1@11.5,11.6 14.4,8.7 v1(17.8,8.7) ; v1(43.25,2.1) R201.1@44.15,2.1
  M1 w0.102: v1(17.8,8.7) 31.2,8.7 37.8,2.1 v1(43.25,2.1) ; v1(57.9,15.6) 113.1,15.6 113.7,15 113.7,14.3 112,12.6 107.8,12.6 v1(105.5,10.3)
  Bottom Layer w0.102: P5.20@18.2,12 18.2,9.1 v1(17.8,8.7) 15.1,8.7 14.4,9.4 14.4,13.5 18.5,17.6 57.1,17.6 57.9,16.8 v1(57.9,15.6) 57.9,9.6 58.6,8.9 61.6,8.9 61.8,9.1 P7.20@61.8,12 ; P9.20@105.4,12 105.4,10.4 v1(105.5,10.3)
1V2_mon0: C201.2 IC3.P14 P5.17 pad.1@70,-3.75 R203.2 | length 84.5
  Top Layer w0.102: C201.2@82.8,-5.6 v1(83.7,-5.6) 85.2,-5.6 IC3.P14@85.6,-5.2
  M2 w0.102: pad.1@70,-3.75 71.35,-5.1 83.2,-5.1 v1(83.7,-5.6)
  Bottom Layer w0.102: P5.17@19.4,12 19.4,9.1 19.9,8.6 34.8,8.6 36,9.8 49.4,9.8 53.6,5.6 61.8,5.6 62.9,4.5 68.5,4.5 70,3 pad.1@70,-3.75 ; R203.2@82.8,-8.2 83.3,-8.2 83.7,-7.8 v1(83.7,-5.6)
1V2_mon1: C202.2 IC3.P13 P5.18 pad.1@69.6,-1.8 R205.2 | length 82.3
  Top Layer w0.102: v1(83.7,-5) 85,-5 IC3.P13@85.6,-4.4
  M2 w0.102: pad.1@69.6,-1.8 70.75,-2.95 70.75,-3.75 71.75,-4.75 83.45,-4.75 v1(83.7,-5)
  Bottom Layer w0.102: P5.18@19,12 19,9 19.8,8.2 35,8.2 36.3,9.5 49.1,9.5 53.3,5.3 61.3,5.3 62.4,4.2 68.2,4.2 69.6,2.8 pad.1@69.6,-1.8 ; R205.2@82.8,-6.9 C202.2@82.8,-5.6 83.1,-5.6 v1(83.7,-5)
1V2_mon2: C203.2 IC3.P12 P7.17 R207.2 | length 123.2
  Top Layer w0.102: C203.2@82.8,-4.4 v1(84.1,-4.4) 84.8,-4.4 IC3.P12@85.6,-3.6
  M2 w0.102: v1(55.9,12.2) 59.9,16.2 113.5,16.2 114.6,15.1 114.6,9.2 113.6,8.2 107.3,8.2 100.3,1.2 97.6,1.2 96,-0.4 96,-2 94.4,-3.6 85.6,-3.6 84.8,-4.4 v1(84.1,-4.4)
  Bottom Layer w0.102: v1(55.9,12.2) 55.9,9.8 57.7,8 62.1,8 63,8.9 P7.17@63,12 ; v1(84.1,-4.4) 84.3,-4.6 R207.2@84.3,-6.9
1V2_mon3: C204.2 IC3.P11 P7.18 R209.2 | length 120.6
  Top Layer w0.102: v1(84.6,-3.8) IC3.P11@85.6,-2.8
  M2 w0.102: v1(56.6,12.2) 60,15.6 113.4,15.6 114,15 114,9.6 113.2,8.8 107.262,8.8 101.762,3.3 97.5,3.3 95.6,1.4 95.6,-1.6 94.4,-2.8 85.6,-2.8 v1(84.6,-3.8)
  Bottom Layer w0.102: v1(56.6,12.2) 56.6,9.7 58,8.3 62,8.3 62.6,8.9 P7.18@62.6,12 ; C204.2@82.8,-4.4 83.2,-4.4 83.8,-3.8 v1(84.6,-3.8) 84.7,-3.9 84.7,-5.5 85.6,-6.4 R209.2@85.6,-6.9
1V2_mon4: C205.2 IC3.P10 P9.17 pad.1@85.1,-2.45 R211.2 | length 40.6
  Top Layer w0.102: C205.2@82.8,-3.2 84.35,-3.2 pad.1@85.1,-2.45 85.15,-2.45 IC3.P10@85.6,-2
  M2 w0.102: pad.1@85.1,-2.45 85.15,-2.45 85.6,-2 94.4,-2 95.2,-1.2 95.2,3.6 99.619,8.019 105.681,8.019 106.6,8.938 v1(106.6,10.3)
  Bottom Layer w0.102: pad.1@85.1,-2.45 85.1,-4.6 86.9,-6.4 R211.2@86.9,-6.9 ; v1(106.6,10.3) P9.17@106.6,12
1V2_mon5: C206.2 IC3.P9 P9.18 pad.1@85.2,-1.6 R213.2 | length 41.1
  Top Layer w0.13: pad.1@85.2,-1.6 IC3.P9@85.6,-1.2
  M2 w0.102: pad.1@85.2,-1.6 85.6,-1.2 94.4,-1.2 94.8,-0.8 94.8,4 99.681,8.881 105.619,8.881 106.2,9.462 v1(106.2,9.6)
  Bottom Layer w0.102: C206.2@82.8,-3.2 83.6,-3.2 pad.1@85.2,-1.6 85.6,-2 85.6,-3.8 88.2,-6.4 R213.2@88.2,-6.9 ; v1(106.2,9.6) P9.18@106.2,12
1V2_RB: C111.1 C112.1 C113.1 C114.1 C115.1 C116.1 C117.1 C118.1 C119.1 C120.1 C121.1 C122.1 C123.1 C124.1 C125.1 C126.1 C127.1 C128.1 C129.1 C130.1 C131.1 C132.1 C133.1 C134.1 C135.1 C160.1 C162.1 C163.1 C164.1 C165.1 C166.1 C167.1 C168.1 IC1.E1 IC1.E3 IC1.E4 IC1.F3 IC1.G3 IC1.G5 IC1.H3 IC1.J3 IC1.J5 IC1.J6 IC1.J7 IC1.J8 IC1.J9 IC1.J11 IC1.K3 IC1.K5 IC1.K6 IC1.K7 IC1.K8 IC1.K9 IC1.K11 IC1.K12 IC1.K13 IC1.L3 IC1.L10 IC1.L11 IC1.L12 IC1.L13 IC1.M3 IC1.M12 IC1.M13 IC1.N3 IC2.38 IC2.40 IC4.E3 IC4.E4 IC4.F3 IC4.G3 IC4.G5 IC4.H3 IC4.J3 IC4.J5 IC4.J6 IC4.J7 IC4.J8 IC4.J9 IC4.J11 IC4.K3 IC4.K6 IC4.K7 IC4.K8 IC4.K9 IC4.K11 IC4.K12 IC4.K13 IC4.L3 IC4.L10 IC4.L11 IC4.L12 IC4.L13 IC4.M3 IC4.M12 IC4.M13 IC4.N3 IC4.T3 IC6.3 IC7.3 P1.4 P11.1 P11.2 pad.1@25.7,3.6 pad.1@29,-8.4 pad.1@52.75,1.25 pad.1@52.75,2.25 pad.1@52.75,-1.25 pad.1@53.25,0.25 pad.1@53.25,1.25 pad.1@53.25,-0.25 pad.1@53.25,-0.75 pad.1@53.25,-1.25 pad.1@53.25,-1.75 pad.1@53.75,2.25 pad.1@54.25,0.25 pad.1@54.25,-0.25 pad.1@54.75,-0.25 pad.1@54.75,-0.75 pad.1@55.25,-0.25 pad.1@55.25,-0.75 pad.1@55.75,-0.25 pad.1@55.75,-0.75 pad.1@56.25,-0.25 pad.1@56.25,-1.25 pad.1@56.75,-1.25 pad.1@57.25,-0.25 pad.1@57.25,-0.75 pad.1@57.75,-0.75 pad.1@57.75,-1.25 pad.1@57.75,-1.75 pad.1@58.25,-0.25 pad.1@58.25,-0.75 pad.1@58.25,-1.25 pad.1@59.25,-1.75 pad.1@59.75,-1.75 pad.1@71.75,1.25 pad.1@71.75,1.75 pad.1@71.75,-0.25 pad.1@71.75,-3.25 pad.1@72.25,0.75 pad.1@72.25,2.25 pad.1@72.25,-0.25 pad.1@72.25,-0.75 pad.1@72.25,-1.25 pad.1@72.25,-1.75 pad.1@72.75,2.25 pad.1@73.25,-0.25 pad.1@73.75,0.25 pad.1@73.75,-0.25 pad.1@73.75,-0.75 pad.1@74.25,-0.25 pad.1@74.25,-0.75 pad.1@74.75,0.25 pad.1@74.75,-0.25 pad.1@74.75,-0.75 pad.1@75.25,-1.25 pad.1@75.75,-0.75 pad.1@75.75,-1.25 pad.1@76.25,0.25 pad.1@76.75,-0.25 pad.1@76.75,-0.75 pad.1@76.75,-1.25 pad.1@77.25,-0.25 pad.1@77.25,-0.75 pad.1@77.25,-1.25 R101.2 R102.1 R103.2 R104.2 R105.2 R106.2 R107.1 R109.2 R110.2 R202.2 R204.2 R206.2 R208.2 R210.2 R237.2 R238.2 R239.2 TP6.1 | length 104.9
  Top Layer w0.076: v1(11.9,-23.6) R204.2@12.7,-23.6 ; IC1.E1@52,2 52.25,1.75 52.75,1.75 IC1.E3@53,2 ; IC1.K5@54,-0.5 pad.1@54.25,-0.25 ; IC1.G5@54,1 54.25,0.75 pad.1@54.25,0.25 ; R238.2@68.9,4.2 68.9,3.6 70.25,2.25 pad.1@72.25,2.25 ; IC4.J5@73,0 72.75,0.25 72.75,0.75 IC4.G5@73,1
  Top Layer w0.102: R202.2@29,23.6 v1(29.9,23.6) ; v1(32.6,10.7) TP6.1@35.4,10.7 ; v1(64.586,-21.438) 64.6,-21.452 P1.4@64.6,-22.2 ; v1(99,-23.5) R208.2@99.8,-23.5 ; R206.2@117.9,23.6 v1(118.7,23.6)
  Top Layer w0.13: pad.1@52.75,-1.25 IC1.M3@53,-1.5 ; pad.1@52.75,1.25 IC1.G3@53,1 ; pad.1@52.75,2.25 IC1.E3@53,2 ; IC1.N3@53,-2 pad.1@53.25,-1.75 ; IC1.L3@53,-1 pad.1@53.25,-1.25 ; IC1.K3@53,-0.5 pad.1@53.25,-0.75 ; IC1.J3@53,0 pad.1@53.25,-0.25 ; IC1.H3@53,0.5 pad.1@53.25,0.25 ; IC1.F3@53,1.5 pad.1@53.25,1.25 ; IC1.E4@53.5,2 pad.1@53.75,2.25 ; IC1.J5@54,0 pad.1@54.25,-0.25 ; pad.1@54.25,0.25 IC1.J6@54.5,0 ; IC1.K6@54.5,-0.5 pad.1@54.75,-0.75 ; pad.1@54.75,-0.25 IC1.K7@55,-0.5 ; IC1.J7@55,0 pad.1@55.25,-0.25 ; pad.1@55.25,-0.75 IC1.K8@55.5,-0.5 ; IC1.J8@55.5,0 pad.1@55.75,-0.25 ; pad.1@55.75,-0.75 IC1.K9@56,-0.5 ; IC1.J9@56,0 pad.1@56.25,-0.25 ; pad.1@56.25,-1.25 IC1.L10@56.5,-1 ; pad.1@56.75,-1.25 IC1.L11@57,-1 ; IC1.K11@57,-0.5 pad.1@57.25,-0.75 ; IC1.J11@57,0 pad.1@57.25,-0.25 ; IC1.M12@57.5,-1.5 pad.1@57.75,-1.75 ; IC1.L12@57.5,-1 pad.1@57.75,-1.25 ; IC1.K12@57.5,-0.5 pad.1@57.75,-0.75 ; IC1.M13@58,-1.5 pad.1@58.25,-1.25 ; IC1.L13@58,-1 pad.1@58.25,-0.75 ; IC1.K13@58,-0.5 pad.1@58.25,-0.25 ; pad.1@71.75,-3.25 IC4.T3@72,-3.5 ; pad.1@71.75,-0.25 IC4.J3@72,0 ; pad.1@71.75,1.25 IC4.G3@72,1 ; pad.1@71.75,1.75 IC4.F3@72,1.5 ; IC4.N3@72,-2 pad.1@72.25,-1.75 ; IC4.M3@72,-1.5 pad.1@72.25,-1.25 ; IC4.L3@72,-1 pad.1@72.25,-0.75 ; IC4.K3@72,-0.5 pad.1@72.25,-0.25 ; IC4.H3@72,0.5 pad.1@72.25,0.75 ; IC4.E3@72,2 pad.1@72.25,2.25 ; IC4.E4@72.5,2 pad.1@72.75,2.25 ; IC4.J5@73,0 pad.1@73.25,-0.25 ; IC4.K6@73.5,-0.5 pad.1@73.75,-0.75 ; IC4.J6@73.5,0 pad.1@73.75,-0.25 ; pad.1@73.75,0.25 IC4.J7@74,0 ; IC4.K7@74,-0.5 pad.1@74.25,-0.75 ; pad.1@74.25,-0.25 IC4.J8@74.5,0 ; IC4.K8@74.5,-0.5 pad.1@74.75,-0.75 ; pad.1@74.75,-0.25 IC4.K9@75,-0.5 ; pad.1@74.75,0.25 IC4.J9@75,0 ; pad.1@75.25,-1.25 IC4.L10@75.5,-1 ; pad.1@75.75,-1.25 IC4.L11@76,-1 ; pad.1@75.75,-0.75 IC4.K11@76,-0.5 ; IC4.J11@76,0 pad.1@76.25,0.25 ; IC4.M12@76.5,-1.5 pad.1@76.75,-1.25 ; IC4.L12@76.5,-1 pad.1@76.75,-0.75 ; IC4.K12@76.5,-0.5 pad.1@76.75,-0.25 ; IC4.M13@77,-1.5 pad.1@77.25,-1.25 ; IC4.L13@77,-1 pad.1@77.25,-0.75 ; IC4.K13@77,-0.5 pad.1@77.25,-0.25
  Top Layer w0.2: IC2.38@26.67,3.4 25.9,3.4 pad.1@25.7,3.6 25.9,3.8 IC2.40@26.67,3.8 ; v1(40,-6.1) IC7.3@40,-5.5 ; v1(40,3.6) IC6.3@40,4.2
  M1 w0.102: pad.1@71.75,-3.25 72.25,-3.25 73.75,-1.75 pad.1@73.75,-0.75
  Bottom Layer w0.076: C133.1@71.56,2.25 C133.1@71.6,2.25
  Bottom Layer w0.102: R104.2@27.9,-6.1 R103.2@27.9,-8.4 pad.1@29,-8.4 30.5,-9.9 R105.2@31.2,-9.9 R106.2@32.5,-9.9 ; R239.2@31.9,10.7 v1(32.6,10.7) ; R110.2@55.7,-9.1 R109.2@57.3,-9.1 R210.2@58.9,-9.1 60.5,-9.1 61.1,-8.5 72.8,-8.5 73.5,-9.2 v1(73.5,-13.453) ; C166.1@77.8,-0.51 77.81,-0.5 79.6,-0.5 80.4,-1.3 80.4,-8.9 81,-9.5 R107.1@81.6,-9.5 ; R237.2@98.7,9.5 98.7,9.6 v1(98.7,10.3)
  Bottom Layer w0.13: v1(46.7,-3.7) R101.2@48.3,-3.7 R102.1@48.3,-2.2 ; pad.1@71.75,-0.25 pad.1@71.8,-0.2
  Bottom Layer w0.2: pad.1@53.75,2.25 pad.1@53.79,2.25 ; C113.1@59.75,-1.31 59.79,-1.31 C113.1@59.8,-1.3
  Bottom Layer w0.3: C119.1@52.56,2.75 52.56,2.44 pad.1@52.75,2.25 ; C125.1@52.71,-2.3 52.9,-2.3 53.25,-1.95 pad.1@53.25,-1.75 ; C116.1@52.75,0.81 pad.1@52.75,1.25 ; pad.1@53.25,-1.25 53.69,-1.25 C117.1@53.75,-1.19 ; pad.1@53.25,-0.25 53.75,-0.25 C126.1@53.75,-0.31 ; C114.1@54.75,-1.19 pad.1@54.75,-0.75 ; C122.1@55.75,-1.19 pad.1@55.75,-0.75 ; pad.1@56.25,-0.25 C120.1@56.25,0.44 ; C118.1@56.75,-1.79 pad.1@56.75,-1.25 ; C123.1@57.7,-2.25 C123.1@57.69,-2.25 57.75,-2.19 pad.1@57.75,-1.75 ; pad.1@58.25,-0.75 58.69,-0.75 C115.1@58.75,-0.69 ; pad.1@58.25,-0.25 58.31,-0.25 58.409,-0.151 58.416,-0.151 58.651,0.084 58.651,0.091 C124.1@58.75,0.19 ; C121.1@59.25,-2.19 pad.1@59.25,-1.75 ; pad.1@59.75,-1.75 C113.1@59.75,-1.31 ; C130.1@71.56,-1.25 pad.1@72.25,-1.25 ; C133.1@71.6,2.25 71.75,2.1 pad.1@71.75,1.75 ; pad.1@71.8,-0.2 71.96,-0.04 C164.1@71.96,0.25 ; C132.1@72.06,-2.25 72.25,-2.06 pad.1@72.25,-1.75 ; C163.1@72.75,-0.31 73.19,-0.31 pad.1@73.25,-0.25 ; pad.1@72.75,2.25 73.06,2.25 C167.1@73.25,2.06 ; pad.1@73.75,-0.75 73.81,-0.81 C168.1@73.81,-1.25 ; pad.1@74.25,-0.25 C129.1@74.25,0.19 ; C128.1@74.75,-1.19 pad.1@74.75,-0.75 ; C134.1@75.75,-1.69 pad.1@75.75,-1.25 ; pad.1@75.75,-0.75 C131.1@75.75,-0.31 ; C165.1@76.75,-1.69 pad.1@76.75,-1.25 ; pad.1@77.25,-1.25 77.3,-1.25 77.75,-1.7 C135.1@77.75,-1.69 ; pad.1@77.25,-0.75 77.56,-0.75 C166.1@77.8,-0.51
  other v1: 52.5,20.7 53.1,20.7 53.7,20.7 54.3,20.7 54.9,20.7 55.5,20.7 56.1,20.7 56.7,20.7 57.3,20.7 57.9,20.7 58.5,20.7 59.1,20.7 59.7,20.7 60.3,20.7 60.9,20.7 61.5,20.7 62.1,20.7 62.7,20.7 63.3,20.7 63.9,20.7 52.5,21.4 53.1,21.4 53.7,21.4 54.3,21.4 54.9,21.4 55.5,21.4 56.1,21.4 56.7,21.4 57.3,21.4 57.9,21.4 58.5,21.4 59.1,21.4 59.7,21.4 60.3,21.4 60.9,21.4 61.5,21.4 62.1,21.4 62.7,21.4 63.3,21.4 63.9,21.4